# Altium PCB Cell Characterization Board V2.PcbDoc (part 1 of 3)
Units mm, origin at the board's own origin, x right, y up, seen from the top; angles counter-clockwise.
Board outline 180.24 x 170.15 mm, 4 copper layers (SIG1, GND, PWR, SIG2), stack 1.746 mm thick; 137 components, 113 nets, 550 pads, 376 vias.
Unrouted connection lines stored in the file: 58.
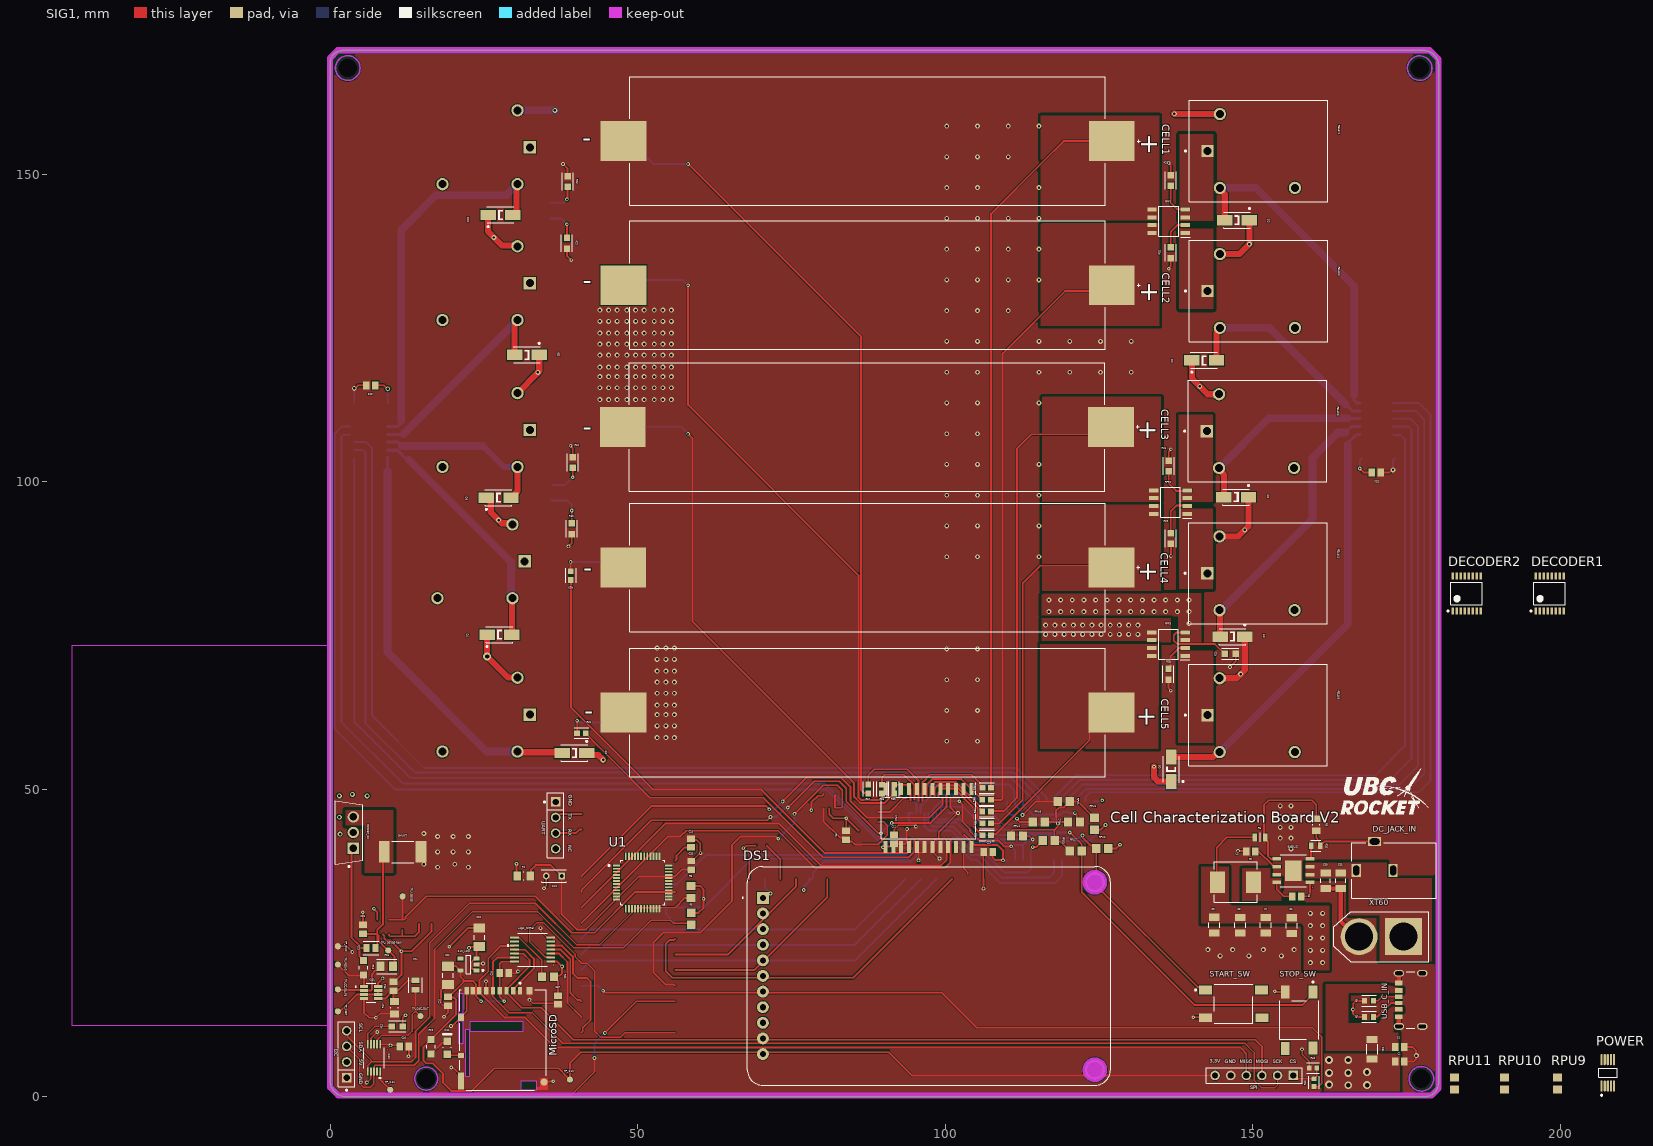
[diagram p0: SIG1 view]
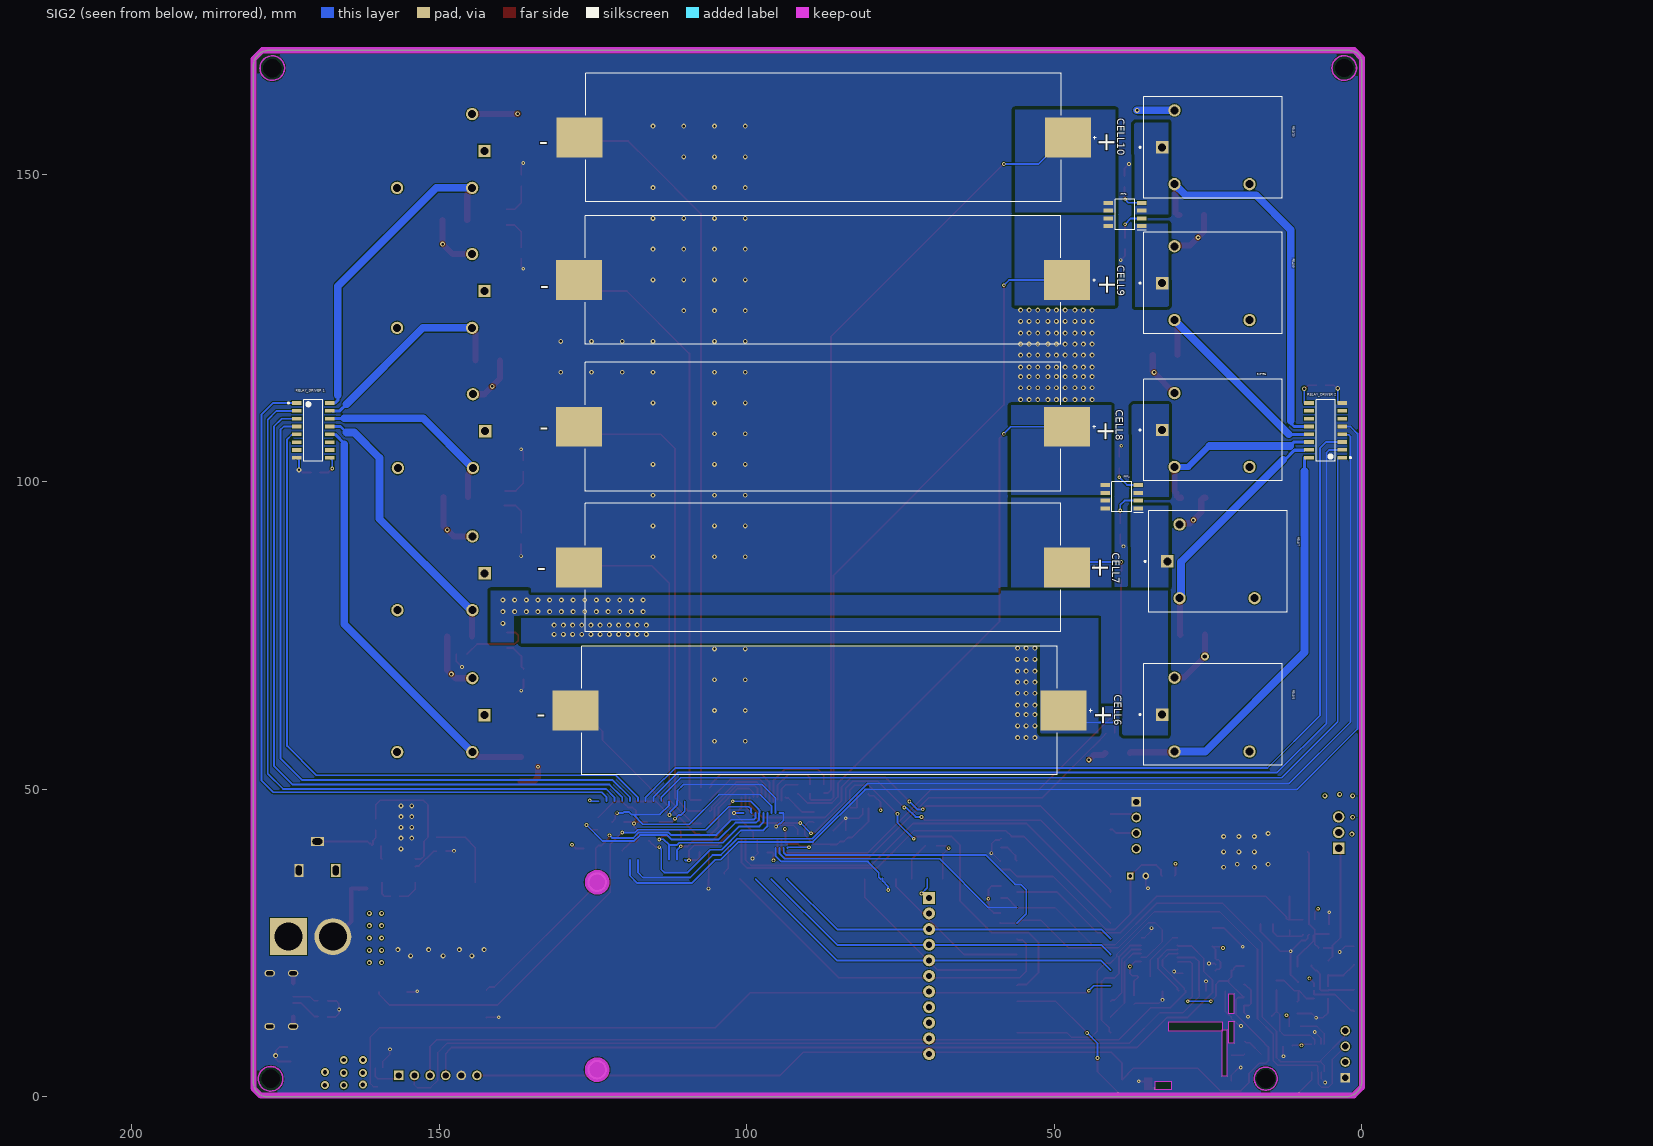
[diagram p1: SIG2 view, seen from below]
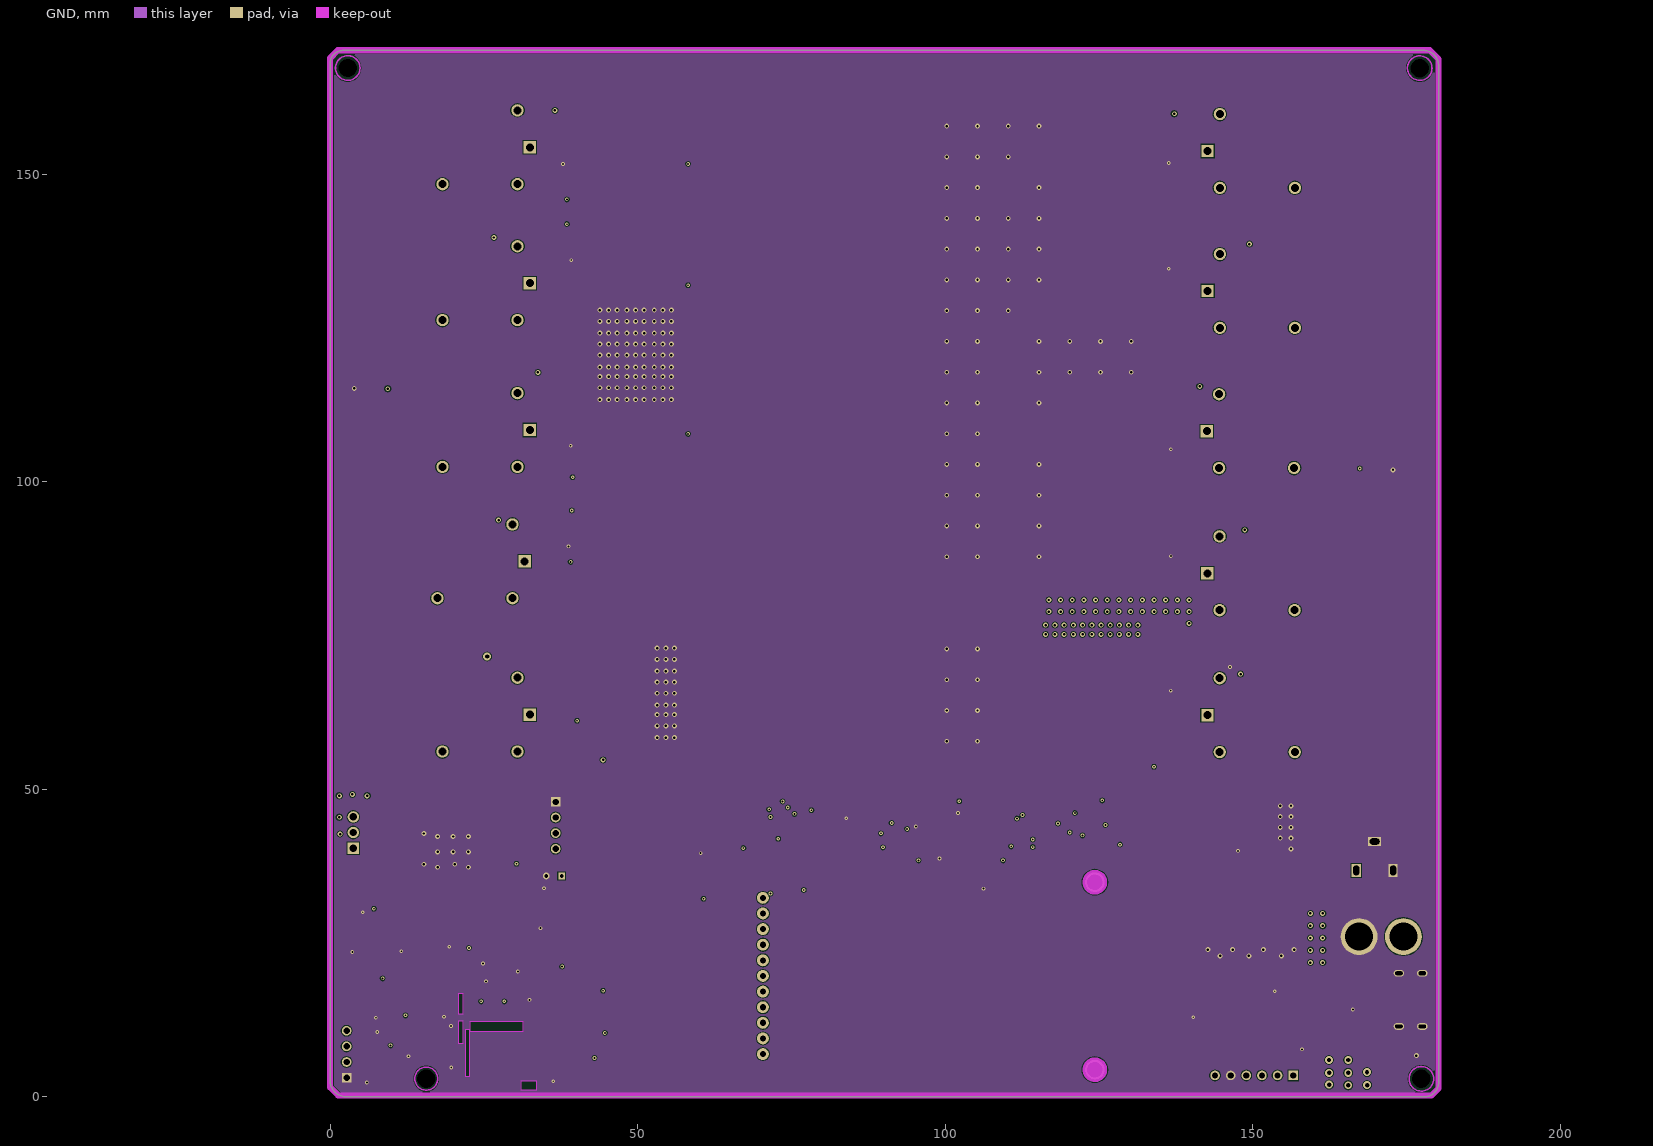
[diagram p2: GND]
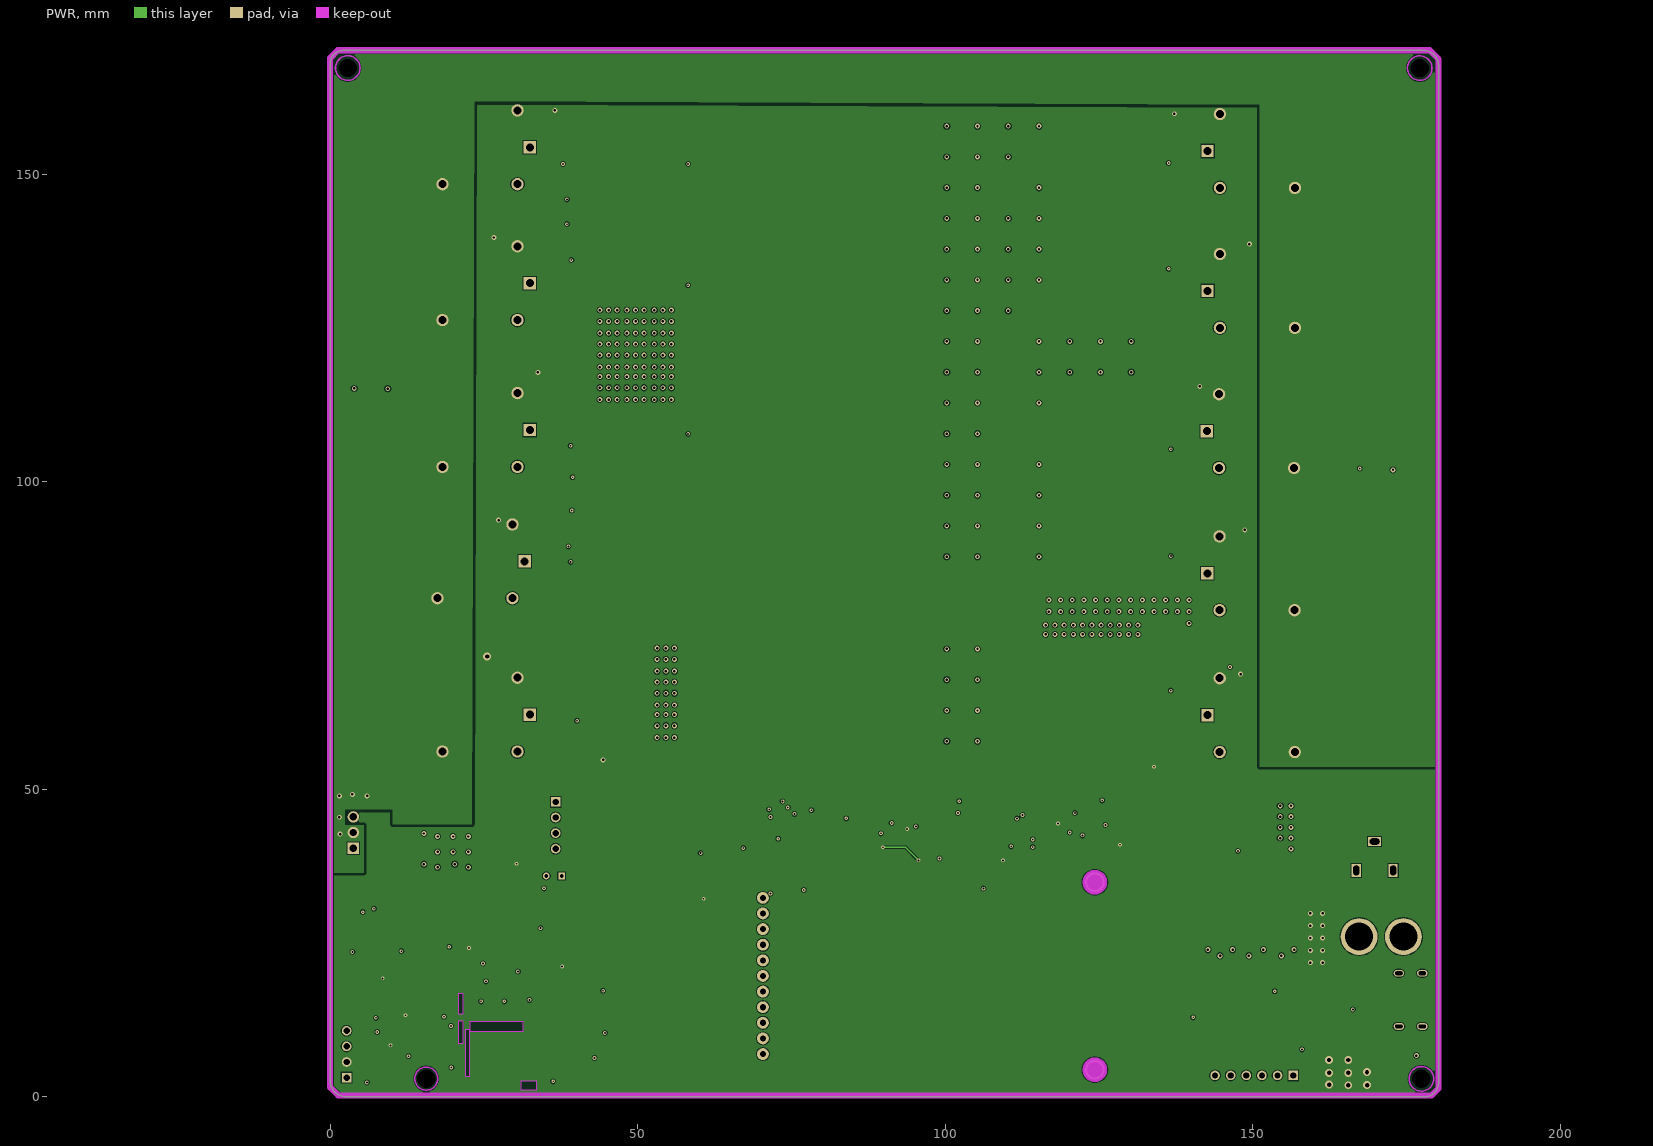
[diagram p3: PWR]
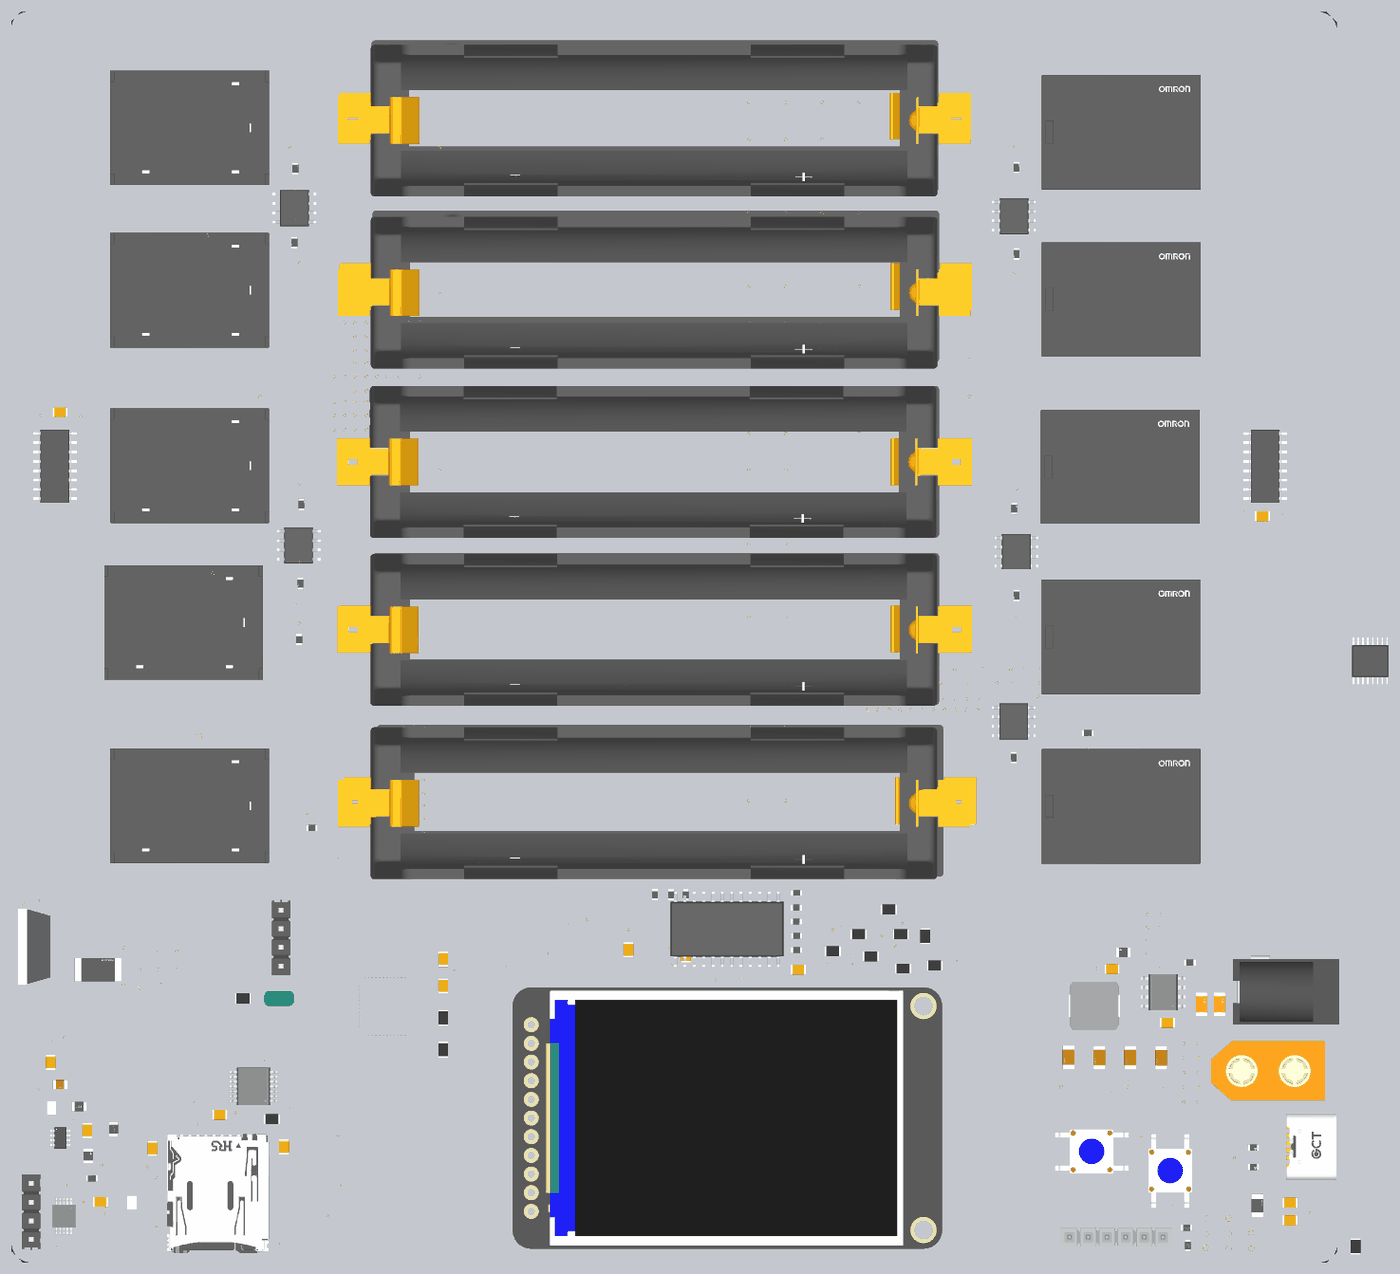
[diagram p5: 3D render of the assembled board from above, using the file's embedded part models]
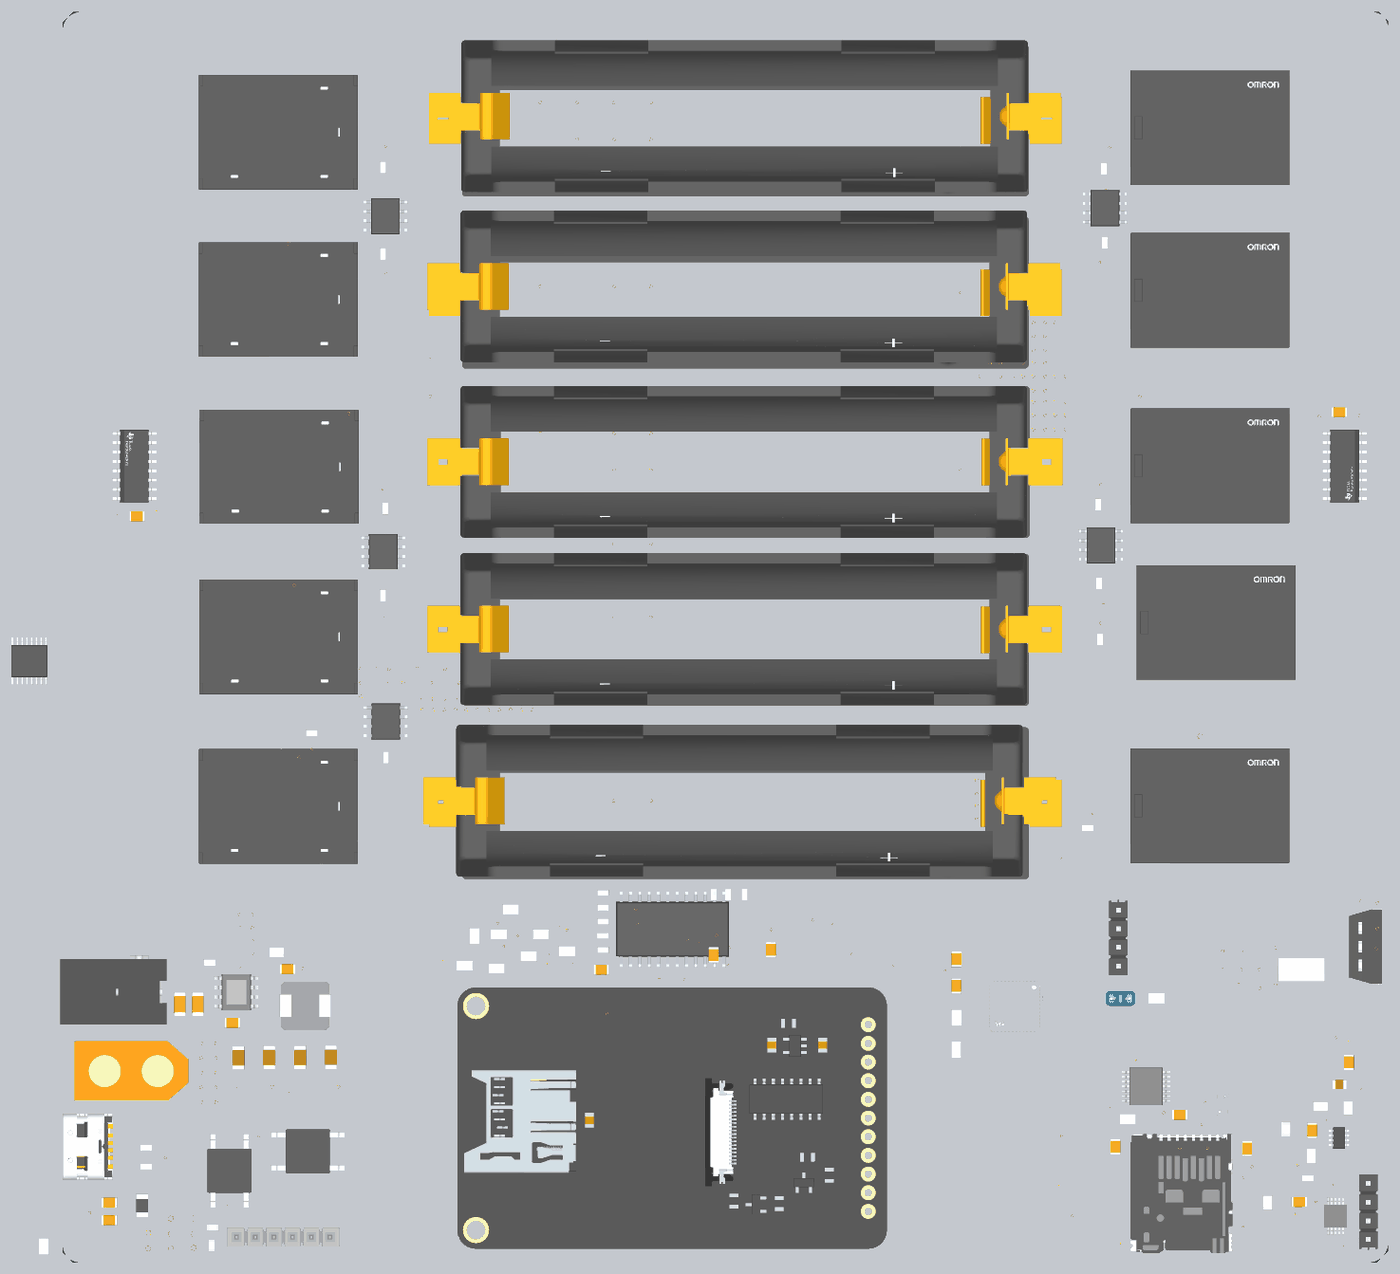
[diagram p6: 3D render of the assembled board from below, using the file's embedded part models]

## Layer stack, top to bottom
Top Solder: solder mask 0.0127, Solder Resist, Dk 3.3
SIG1: signal copper 0.0178
Dielectric 2: prepreg 0.0711, PP-006, Dk 4.1
GND: signal copper 0.035
Dielectric1: core 1.4986, FR-4, Dk 4.3
PWR: signal copper 0.035
Dielectric 3: prepreg 0.0711, PP-006, Dk 4.1
SIG2: signal copper 0.0178
Bottom Solder: solder mask 0.0127, Solder Resist, Dk 3.3

## Board outline
0,2.642 0,168.021 cw(c2.134,168.021) 2.134,170.155 177.749,170.155 cw(c177.749,167.665) 180.238,167.665 180.238,2.337 cw(c177.902,2.337) 177.902,0 2.642,0 cw(c2.642,2.642)

## Design rules (kind name [scope] priority, off if disabled: settings)
BoardOutlineClearance BoardOutlineClearance_1 [(InComponent('XT60') AND InComponent('DC JACK - IN'))] p1: gap=0 ignorepadtopadclearanceinfootprint=FALSE
BoardOutlineClearance [All] p2: gap=0.2 ignorepadtopadclearanceinfootprint=FALSE
Clearance Poly-Clearance [InPolygon vs InPolygon] p1: gap=0.5 ignorepadtopadclearanceinfootprint=TRUE
Clearance MicroSD [InComponent('MicroSD')] p2: gap=0 ignorepadtopadclearanceinfootprint=TRUE
Clearance [WithinRoom('DAC_Clearance')] p3: gap=0.08 ignorepadtopadclearanceinfootprint=TRUE
Clearance Clearance_1 [All] p4: gap=0.14 ignorepadtopadclearanceinfootprint=TRUE
ComponentClearance "Cell Holder" [InComponent('Cell*')] p1: gap=0.254 collisioncheckmode=3 verticalgap=0 showdistances=FALSE checkcomponentboundary=TRUE
ComponentClearance ComponentClearance_1 [All] p2: gap=0.254 collisioncheckmode=3 verticalgap=0.254 showdistances=FALSE
DiffPairsRouting [All] p1: maxlimit=0.254 minlimit=0.254 mostfreqgap=0.254 toplayer_minwidth=0.254 toplayer_maxwidth=0.254 toplayer_prefwidth=0.254 midlayer1_minwidth=0.254 midlayer1_maxwidth=0.254 midlayer1_prefwidth=0.254 midlayer2_minwidth=0.254 midlayer2_maxwidth=0.254 midlayer2_prefwidth=0.254 bottomlayer_minwidth=0.254 bottomlayer_maxwidth=0.254 bottomlayer_prefwidth=0.254 maxuncoupledlength=12.7
HoleSize [All] p1: absolutevalues=TRUE maxlimit=7.62 minlimit=0.25 maxpercent=80.000 minpercent=20.000
MinimumAnnularRing [All] p1: minimumring=0.15
MinimumSolderMaskSliver SLIVER_IC_GANGPADS [InComponent('OA1') or InComponent('OA I_SENSE') or   InComponent('OA UB 2') or InComponent('I2C_EXPANDER')] p1: minsoldermaskwidth=0
MinimumSolderMaskSliver MinimumSolderMaskSliver_1 [All] p2: minsoldermaskwidth=0.08
PasteMaskExpansion [All] p1: expansion=0.254
PlaneClearance [All] p1: clearance=0.381
PlaneConnect [All] p1: planeconnectstyle=Direct reliefexpansion=0.508 reliefentries=4 reliefconductorwidth=0.254 reliefairgap=0.254
PolygonConnect [All] p1: connectstyle=Direct reliefconductorwidth=0.254 reliefentries=4 polygonreliefangle="90 Angle" airgapwidth=0.254
RoutingVias [All] p1: holewidth=0.35 width=0.5 viastyle="Through Hole" minholewidth=0.25 minwidth=0.5 maxholewidth=1 maxwidth=1.5
SMDNeckDown [All] p1: percent=100.000
SilkToSilkClearance [All] p1: silktosilkclearance=0.13
SilkToSolderMaskClearance SilkscreenOverComponentPads [InComponent('FB1')] p1: minsilkscreentomaskgap=0 clearancetoexposedcopper=TRUE
SilkToSolderMaskClearance [IsPad] p2: minsilkscreentomaskgap=0.15 clearancetoexposedcopper=TRUE
SolderMaskExpansion TentVias [IsVia] p1: expansion=0.102 istentingtop=FALSE
SolderMaskExpansion [All] p2: expansion=0.102 istentingtop=FALSE
SupplyNets "Schematic Supply Nets_2" [InNet('3.3V')] p1: voltage=0.000
SupplyNets "Schematic Supply Nets_1" [InNet('5V')] p2: voltage=0.000
SupplyNets "Schematic Supply Nets" [InNet('GND')] p3: voltage=0.000
Width DAC [WithinRoom('DAC_Clearance')] p1: maxlimit=0.254 minlimit=0.2 preferedwidth=0.254 midlayer1_minwidth=0.254 midlayer2_minwidth=0.254 minimp=50.000000 maximp=50.000000 favimp=50.000000
Width [All] p2: maxlimit=2 minlimit=0.25 preferedwidth=1 midlayer1_minwidth=0.254 midlayer1_maxwidth=0.254 midlayer1_prefwidth=0.254 midlayer2_minwidth=0.254 midlayer2_maxwidth=0.254 midlayer2_prefwidth=0.254 bottomlayer_minwidth=0.3 bottomlayer_maxwidth=1.25 minimp=50.000000 maximp=50.000000 favimp=50.000000
21 further rules are at their usual default settings.

## Classes and differential pairs
component class U_MicroSD: C20 C26 C27 D11 Logic_Shifter MicroSD R19 R21 R42 R43 SPI
component class U_MCU: C24 DS1 I2C R5 R8 U1 UART
component class "U_Constant Current Sink": C13 C15 C17 C25 DAC MOSFET_CC NTC OA1 R1 R12 R13 R14 R15 R17 SHUNT
component class "U_Cell Monitoring": C12 C16 MUX "POWER MONITOR IC" R32 R33 R34 R35 R36 R37 R38 R39 R40 R41 RPU9 RPU10 RPU11
component class "U_Cell Holders": CELL1 CELL2 CELL3 CELL4 CELL5 CELL6 CELL7 CELL8 CELL9 CELL10 R22 R23 R24 R25 R26 R27 R28 R29 R30 R31 RPP1 RPP2 RPP3 RPP4 RPP5
component class "U_Buck and LDO": 3.3V_LDO BUCK_IC C1 C2 C3 C5 C6 C7 C8 C9 C10 C11 C21 C22 DC_JACK_IN FB1 L1 R3 R4 R6 R9 R20 USB_C_IN XT60
component class "U_Sequantial Cell Switching": C4 C14 C19 C23 D1 D2 D3 D4 D5 D6 D7 D8 D9 D10 DECODER1 DECODER2 RELAY1 RELAY2 RELAY3 RELAY4 RELAY5 RELAY6 RELAY7 RELAY8 RELAY9 RELAY10 "RELAY_DRIVER 1" "RELAY_DRIVER 2" RPU1 RPU2 RPU3 RPU4 RPU5 RPU6 RPU7 RPU8 START_SW STOP_SW

## Components (designator, comment, footprint, x,y, rotation, side; value= is the part's Value field where it differs from the comment)
3.3V_LDO "MIC5504-3.3YM5-TR" FP-SOT23-5LD-PL-1-MFG 22.487,21.51 r180 top
BUCK_IC "AP64502QSP-13" SO-8EP_DIO 156.618,36.774 r180 top
C1 "100nF" CAPC2013X95X50LL10T25 173.888,8.144 r180 top
C2 "100nF" CAPC2013X95X50LL10T25 173.888,5.74 r180 top
C3 "100nF" CAPC2013X95X50LL10T25 157.182,32.614 r0 top
C4 "100nF" CAPC2013X95X50LL10T25 83.922,42.54 r90 top
C5 "100nF" CAPC2013X95X50LL10T25 149.667,39.929 r0 top
C6 "47uF" FP-GRM31C-0_2-e0_3_0_8-IPC_C 156.354,27.843 r270 top
C7 "47uF" FP-GRM31C-0_2-e0_3_0_8-IPC_C 152.151,27.898 r270 top
C8 "47uF" FP-GRM31C-0_2-e0_3_0_8-IPC_C 147.96,27.898 r270 top
C9 "47uF" FP-GRM31C-0_2-e0_3_0_8-IPC_C 143.769,27.924 r270 top
C10 "10uF" FP-CL31-IPC_C 161.851,35.141 r270 top
C11 "10uF" FP-CL31-IPC_C 164.301,35.141 r270 top
C12 "100nF" CAPC2013X95X50LL10T25 91.712,41.853 r270 top
C13 "10nF" FP-GCM219-0_15-IPC_C 6.642,24.21 r0 top
C14 "100nF" CAPC2013X95X50LL10T25 170.121,101.535 r180 top
C15 "100nF" CAPC2013X95X50LL10T25 12.088,8.217 r0 top
C16 "100nF" CAPC2013X95X50LL10T25 5.348,27.232 r90 top
C17 "100nF" CAPC2013X95X50LL10T25 10.323,17.974 r90 top
C19 "100nF" CAPC2013X95X50LL10T25 6.629,115.697 r0 top
C20 "100nF" CAPC2013X95X50LL10T25 19.164,15.532 r90 top
C21 "1uF" CAPC3216X180X50ML20T25 19.164,19.749 r90 top
C22 "1uF" CAPC3216X180X50ML20T25 24.275,25.932 r270 top
C23 "100nF" CAPC2013X95X50LL10T25 107,39.84 r180 top
C24 "100nF" CAPC2013X95X50LL10T25 58.701,41.273 r270 top
C25 "100nF" CAPC2013X95X50LL10T25 58.721,37.624 r270 top
C26 "100nF" CAPC2013X95X50LL10T25 28.325,20.099 r180 top
C27 "100nF" CAPC2013X95X50LL10T25 37.075,15.745 r90 top
CELL1 "1042P" FP-1042P-MFG 87.399,155.392 r0 top
CELL2 "1042P" FP-1042P-MFG 87.399,131.966 r0 top
CELL3 "1042P" FP-1042P-MFG 87.272,108.928 r0 top
CELL4 "1042P" FP-1042P-MFG 87.349,86.068 r0 top
CELL5 "1042P" FP-1042P-MFG 87.374,62.497 r0 top
CELL6 "1042P" FP-1042P-MFG 88.189,62.814 r180 bottom
CELL7 "1042P" FP-1042P-MFG 87.619,86.066 r180 bottom
CELL8 "1042P" FP-1042P-MFG 87.619,108.951 r180 bottom
CELL9 "1042P" FP-1042P-MFG 87.619,132.806 r180 bottom
CELL10 "1042P" FP-1042P-MFG 87.503,155.956 r180 bottom
D1 "S1M-13-F" DIOD-S1M-13-F-SMA-2_V 147.472,142.545 r0 top
D2 "S1M-13-F" DIOD-S1M-13-F-SMA-2_V 142.113,119.736 r180 top
D3 "S1M-13-F" DIOD-S1M-13-F-SMA-2_V 147.325,97.522 r0 top
D4 "S1M-13-F" DIOD-S1M-13-F-SMA-2_V 146.714,74.836 r0 top
D5 "S1M-13-F" DIOD-S1M-13-F-SMA-2_V 136.754,53.264 r270 top
D6 "S1M-13-F" DIOD-S1M-13-F-SMA-2_V 39.726,55.905 r0 top
D7 "S1M-13-F" DIOD-S1M-13-F-SMA-2_V 27.534,75.133 r180 top
D8 "S1M-13-F" DIOD-S1M-13-F-SMA-2_V 27.404,97.415 r180 top
D9 "S1M-13-F" DIOD-S1M-13-F-SMA-2_V 32.004,120.625 r0 top
D10 "S1M-13-F" DIOD-S1M-13-F-SMA-2_V 27.686,143.383 r180 top
D11 "SD Detect" LTST-C170KSKT_V 19.062,8.002 r90 top
DAC "DAC60501ZDGSR" DGS10_TEX 7.142,6.325 r270 top
DC_JACK_IN "PJ-102BH" CUI-PJ-102BH_V 169.84,36.818 r0 top
DECODER1 "CD74HCT238PWR" PW0016A_L 198.272,81.839 r90 top
DECODER2 "CD74HCT238PWR" PW0016A_L 184.785,81.839 r90 top
DS1 "4311" MODULE_4311 97.361,19.655 r270 top
FB1 "3.5A 120ohm" FP-BLM31-0_2-t1_1-MFG 169.438,7.719 r90 top
I2C "TSW-104-23-T-S" FP-TSW-104-23-T-S-MFG 2.692,6.934 r90 top
L1 "MGAH06036R8M-10" IND_MGAH06036R8M-10 147.244,34.925 r180 top value=6.8µH
Logic_Shifter "TXU0304PWR" TSSOP14_PW_TEX 32.925,23.944 r180 top
MicroSD "DM3AT-SF-PEJM5(40)" FP-DM3AT-SF-PEJM5_40-MFG 28.1,9.25 r0 top
MOSFET_CC "IRLZ44NPBF" FP-PG-TO220-3-MFG 3.073,42.978 r180 top
MUX "CD74HCT4067M" SOIC127P1030X265-24N 97.307,45.331 r270 top
NTC "NXRT15XH103FA1B030" FP-NXR_151B030-MFG 36.4,35.922 r180 top
OA1 "TLV9162IDDFR" SOT65P280X110-8N 6.658,16.945 r0 top
"POWER MONITOR IC" "INA226AQDGSRQ1" FP-DGS0010A-IPC_A 207.747,3.912 r90 top
R1 "10k" RESC2013X50X35ML15T15 31.472,35.922 r180 top
R3 "5.1K" FP-MCT0603-IPC_B 168.91,15.623 r0 top
R4 "5.1K" FP-MCT0603-IPC_B 168.91,13.005 r0 top
R5 "Resistor 4k7 +/-1% 0805 125 mW" RESC2013X70X40ML20T20 58.721,28.939 r90 top value=4.7k
R6 "43k" FP-MCU0805-IPC_C 151.196,42.2 r180 top
R8 "Resistor 4k7 +/-1% 0805 125 mW" RESC2013X70X40ML20T20 58.701,33.312 r90 top value=4.7k
R9 "8.2k" RESC0805(2012)_N 160.35,44.247 r90 top value="8200.00 Ohm"
R12 "10k" FP-AC0603-IPC_A 10.935,11.453 r180 top
R13 "300" FP-CR0805-MFG 5.439,20.994 r270 top
R14 "18k" FP-CRGP0805-IPC_C 13.888,18.154 r270 top value=18KΩ
R15 "1k" FP-RN73R2A-IPC_A 9.204,21.213 r0 top
R17 "2k" FP-MCU0805-IPC_A 10.461,14.487 r90 top
R19 "300" FP-CR0805-MFG 16.4,8.129 r90 top
R20 "200k" FP-CRCW0603-HPe3-MFG 160.248,40.822 r180 top
R21 "Resistor 4k7 +/-1% 0805 125 mW" RESC2013X70X40ML20T20 35.425,19.529 r0 top value=4.7k
R22 "10k" FP-AC0603-IPC_A 38.623,148.832 r90 top
R23 "10k" FP-AC0603-IPC_A 146.367,72.029 r0 top
R24 "10k" FP-AC0603-IPC_A 39.446,103.13 r90 top
R25 "10k" FP-AC0603-IPC_A 136.357,102.586 r90 top
R26 "10k" FP-AC0603-IPC_A 136.677,148.996 r90 top
R27 "10k" FP-AC0603-IPC_A 38.503,138.782 r270 top
R28 "10k" FP-AC0603-IPC_A 136.296,68.708 r270 top
R29 "10k" FP-AC0603-IPC_A 136.677,90.768 r270 top
R30 "10k" FP-AC0603-IPC_A 39.296,92.364 r270 top
R31 "10k" FP-AC0603-IPC_A 136.677,137.236 r270 top
R32 "2k" FP-TFCR0603-IPC_B 106.767,42.518 r180 top
R33 "2k" FP-TFCR0603-IPC_B 106.777,44.454 r180 top
R34 "2k" FP-TFCR0603-IPC_B 106.742,46.4 r180 top
R35 "2k" FP-TFCR0603-IPC_B 106.742,48.287 r180 top
R36 "2k" FP-TFCR0603-IPC_B 106.767,50.251 r180 top
R37 "2k" FP-TFCR0603-IPC_B 87.507,50.054 r90 top
R38 "2k" FP-TFCR0603-IPC_B 89.738,50.038 r90 top
R39 "2k" FP-TFCR0603-IPC_B 91.712,50.038 r90 top
R40 "2k" FP-TFCR0603-IPC_B 39.141,84.76 r270 top
R41 "2k" FP-TFCR0603-IPC_B 40.869,59.131 r0 top
R42 "1.2k" FP-CRGCQ0603-IPC_C 159.986,2.305 r270 top value=1.2KΩ
R43 "2.2k" FP-CRGCQ0603-IPC_C 159.811,4.72 r0 top value=2.2KΩ
RELAY1 "G5LE-1A DC5" FP-G5LE-1A_DC5-MFG 150.923,153.788 r0 top
RELAY2 "G5LE-1A DC5" FP-G5LE-1A_DC5-MFG 150.923,131.03 r0 top
RELAY3 "G5LE-1A DC5" FP-G5LE-1A_DC5-MFG 150.796,108.242 r0 top
RELAY4 "G5LE-1A DC5" FP-G5LE-1A_DC5-MFG 150.873,85.132 r0 top
RELAY5 "G5LE-1A DC5" FP-G5LE-1A_DC5-MFG 150.898,62.061 r0 top
RELAY6 "G5LE-1A DC5" FP-G5LE-1A_DC5-MFG 24.222,62.143 r180 bottom
RELAY7 "G5LE-1A DC5" FP-G5LE-1A_DC5-MFG 23.396,87.071 r180 bottom
RELAY8 "G5LE-1A DC5" FP-G5LE-1A_DC5-MFG 24.222,108.423 r180 bottom
RELAY9 "G5LE-1A DC5" FP-G5LE-1A_DC5-MFG 24.222,132.298 r180 bottom
RELAY10 "G5LE-1A DC5" FP-G5LE-1A_DC5-MFG 24.222,154.392 r180 bottom
"RELAY_DRIVER 1" "ULN2003V12DR" FP-D0016A-MFG 170.494,108.356 r180 bottom
"RELAY_DRIVER 2" "ULN2003V12DR" FP-D0016A-MFG 5.904,108.37 r0 bottom
RPP1 "MCQ7328-TP" SOIC127P600X175-8N 136.347,142.372 r180 top
RPP2 "MCQ7328-TP" SOIC127P600X175-8N 136.652,96.694 r180 top
RPP3 "MCQ7328-TP" SOIC127P600X175-8N 136.302,73.609 r180 top
RPP4 "MCQ7328-TP" SOIC127P600X175-8N 39.046,97.585 r0 bottom
RPP5 "MCQ7328-TP" SOIC127P600X175-8N 38.503,143.467 r0 bottom
RPU1 "Resistor 4k7 +/-1% 0805 125 mW" RESC2013X70X40ML20T20 119.299,48.044 r0 top value=4.7k
RPU2 "Resistor 4k7 +/-1% 0805 125 mW" RESC2013X70X40ML20T20 120.949,44.679 r180 top value=4.7k
RPU3 "Resistor 4k7 +/-1% 0805 125 mW" RESC2013X70X40ML20T20 116.869,41.653 r0 top value=4.7k
RPU4 "Resistor 4k7 +/-1% 0805 125 mW" RESC2013X70X40ML20T20 111.674,42.378 r180 top value=4.7k
RPU5 "Resistor 4k7 +/-1% 0805 125 mW" RESC2013X70X40ML20T20 124.257,44.415 r90 top value=4.7k
RPU6 "Resistor 4k7 +/-1% 0805 125 mW" RESC2013X70X40ML20T20 125.552,40.403 r0 top value=4.7k
RPU7 "Resistor 4k7 +/-1% 0805 125 mW" RESC2013X70X40ML20T20 121.249,40 r180 top value=4.7k
RPU8 "Resistor 4k7 +/-1% 0805 125 mW" RESC2013X70X40ML20T20 115.219,44.679 r180 top value=4.7k
RPU9 "Resistor 4k7 +/-1% 0805 125 mW" RESC2013X70X40ML20T20 199.568,2.184 r90 top value=4.7k
RPU10 "Resistor 4k7 +/-1% 0805 125 mW" RESC2013X70X40ML20T20 190.932,2.184 r90 top value=4.7k
RPU11 "Resistor 4k7 +/-1% 0805 125 mW" RESC2013X70X40ML20T20 182.804,2.184 r90 top value=4.7k
SHUNT "0.05" FP-CRA2512-IPC_A 11.794,39.827 r0 top
SPI "TSW-106-07-G-S" SMTC-TSW-106-07-X-S 156.591,3.48 r180 top
START_SW "2-1977223-2" FP-2-1977223-2-MFG 146.893,15.123 r90 top
STOP_SW "2-1977223-2" FP-2-1977223-2-MFG 157.561,12.505 r0 top
U1 "STM32G431CBT6" FP-LQFP48-5B-MFG 50.825,34.84 r0 top
UART "TSW-104-23-T-S" FP-TSW-104-23-T-S-MFG 36.681,44.145 r270 top
USB_C_IN "USB4125-GF-A-0190" FP-USB4125-GF-A-0190-MFG 176.781,15.773 r270 top
XT60 "XT60-M" AMASS_XT60-M 170.91,26.045 r180 top

## Footprints (in the part's own frame and the unit in brackets; to place one, negate y for a bottom-side part, rotate by r counter-clockwise, add the part's x,y. Pads: shape width x height; smd on the part's side, far side on the other; paste and mask are expansions set on the pad)
AMASS_XT60-M [mm]
  round 6 hole 4.55: N(3.6,0)
  rect 6x6 / inner round 6 / far side rect 6x6 hole 4.55: P(-3.6,0)
  silkscreen extent -7.75,-4.05 7.75,4.05, body extent -7.75,-4.05 7.75,4.05, height 16
CAPC2013X95X50LL10T25 [mm] "Chip Capacitor, 2-Leads, Body 2.10x1.35mm, IPC High Density"
  rect 1.05x1.3 smd: 1(-0.725,0) 2(0.725,0)
  body extent -1.05,-0.67 1.05,0.67, height 0.95
CAPC3216X180X50ML20T25 [mm] "Chip Capacitor, 2-Leads, Body 3.40x1.80mm, IPC Low Density"
  rect 1.5x1.9 smd: 1(-1.5,0) 2(1.5,0)
  silkscreen extent -0.35,-0.85 0.35,0.85, body extent -1.7,-0.9 1.7,0.9, height 1.8
CUI-PJ-102BH_V [mm] "THD, 3-Leads, Body 14.4x9mm, Height 11mm"
  rect 1.5x2.1 hole 1 slot 1.6 at 90 deg: 1(-3,0) 2(3,0)
  rect 2.1x1.5 hole 1 slot 1.6 at 0 deg: 3(0,4.7)
  silkscreen extent -3.7,-4.5 10.02,4.5, body extent -3.7,-4.5 10.7,4.9, height 11
DGS10_TEX [mil]
  rect 52.5x11 smd paste+0 mask+0: 1(-87.25,39.37) 2(-87.25,19.69) 3(-87.25,0) 4(-87.25,-19.68) 5(-87.25,-39.37) 6(87.25,-39.37) 7(87.25,-19.68) 8(87.25,0) 9(87.25,19.69) 10(87.25,39.37)
  silkscreen extent -66,-66 134,66, body extent -99,-61 99,61, height 43
DIOD-S1M-13-F-SMA-2_V [mm] "SMD, 2-Leads, Body 4.3x2.605mm, Height 2.3mm"
  rect 2.5x1.7 smd: 1(-2,0) 2(2,0)
  silkscreen extent -2.15,-1.3 2.15,2.03, body extent -2.15,-1.3 2.15,1.3, height 2.3
FP-2-1977223-2-MFG [mm]
  rect 1.4x2.1 smd paste+0 mask+0: 1(2.25,4.55) 2(2.25,-4.55) 3(-2.25,4.55) 4(-2.25,-4.65)
  silkscreen extent -3.15,-3.15 3.15,6.27, body extent -3.25,-5.8 3.25,5.7, height 0.25
FP-1042P-MFG [mil]
  rect 294x255 smd paste+0 mask+0: 1(-1562.5,0) 2(1562.5,0)
  silkscreen extent -1522,-412 1745,412, body extent -1693,-407 1693,406, height 595
FP-AC0603-IPC_A [mm]
  rect 1.059x1.012 smd paste+0 mask+0: 1(-0.877,0) 2(0.877,0)
  silkscreen extent -1.41,-0.91 1.41,0.91, body extent -0.8,-0.4 0.8,0.4, height 0.55
FP-BLM31-0_2-t1_1-MFG [mm]
  rect 1.15x1.8 smd paste+0 mask+0: 1(-1.575,0) 2(1.575,0)
  silkscreen extent -0.82,-0.9 0.82,0.9, body extent -2.25,-1 2.25,1, height 0.25
FP-CL31-IPC_C [mm]
  rect 1.154x1.706 smd paste+0 mask+0: 1(-1.276,0) 2(1.276,0)
  silkscreen extent -0.32,-0.8 0.32,0.8, body extent -1.6,-0.8 1.6,0.8, height 1.8
FP-CR0805-MFG [mm]
  rect 1.15x1.15 smd paste+0 mask+0: 1(-1.175,0) 2(1.175,0)
  silkscreen extent -0.23,-0.67 0.23,0.67, body extent -1.85,-0.77 1.85,0.77, height 0.25
FP-CRA2512-IPC_A [mm]
  rect 1.756x3.506 smd paste+0 mask+0: 1(-2.975,0) 2(2.975,0)
  silkscreen extent -1.8,-1.75 1.8,1.75, body extent -3.2,-1.6 3.2,1.6, height 0.9
FP-CRCW0603-HPe3-MFG [mm]
  rect 0.75x1 smd paste+0 mask+0: 1(-0.75,0) 2(0.75,0)
  silkscreen extent -0.8,-0.9 0.8,0.9, body extent -0.8,-0.43 0.8,0.43, height 0.55
FP-CRGCQ0603-IPC_C [mm]
  rect 0.758x0.812 smd paste+0 mask+0: 1(-0.627,0) 2(0.627,0)
  silkscreen extent -1.01,-0.85 1.01,0.85, body extent -1.11,-0.55 1.11,0.55, height 0.25
FP-CRGP0805-IPC_C [mm]
  rect 0.906x1.31 smd paste+0 mask+0: 1(-0.776,0) 2(0.776,0)
  silkscreen extent -1.23,-1.1 1.23,1.1, body extent -1.33,-0.8 1.33,0.8, height 0.25
FP-D0016A-MFG [mm]
  rect 1.55x0.6 smd paste-1000 mask+0: 1(-2.7,4.445) 2(-2.7,3.175) 3(-2.7,1.905) 4(-2.7,0.635) 5(-2.7,-0.635) 6(-2.7,-1.905) 7(-2.7,-3.175) 8(-2.7,-4.445) 9(2.7,-4.445) 10(2.7,-3.175) 11(2.7,-1.905) 12(2.7,-0.635) 13(2.7,0.635) 14(2.7,1.905) 15(2.7,3.175) 16(2.7,4.445)
  silkscreen extent -4.18,-5 1.55,5, body extent -3,-4.95 3,4.95, height 1.75
FP-DGS0010A-IPC_A [mm]
  rect 1.857x0.35 smd paste+0 mask+0: 1(-2.151,1)
  rrect100% 1.857x0.35 smd paste+0 mask+0: 2(-2.151,0.5) 3(-2.151,0) 4(-2.151,-0.5) 5(-2.151,-1) 6(2.151,-1) 7(2.151,-0.5) 8(2.151,0) 9(2.151,0.5) 10(2.151,1)
  silkscreen extent -3.78,-1.5 0.72,1.5
FP-DM3AT-SF-PEJM5_40-MFG [mm]
  rect 0.7x1.2 smd paste+0 mask+0: 1(2.775,7.975) 2(1.675,7.975) 3(0.575,7.975) 4(-0.525,7.975) 5(-1.625,7.975) 6(-2.725,7.975) 7(-3.825,7.975) 8(-4.925,7.975) 9(-5.875,7.975)
  rect 1x0.8 smd paste+0 mask+0: 10(-6.825,-2.525)
  rect 1x1.2 smd paste+0 mask+0: 11(4.325,7.975) 12(-6.825,3.675)
  rect 1x2.8 smd paste+0 mask+0: 13(-6.825,-6.675)
  round 1.145 smd paste+0 mask+0: 14(6.689,-6.861)
  SIG1 region: 6.025,-6.175 7.325,-6.175 7.325,-8.075 5.475,-8.075 5.475,-7.725 5.875,-7.725 6.025,-7.575 6.025,-6.175
  Keep-Out Layer region: -7.225,4.275 -6.475,4.275 -6.475,7.525 -7.225,7.525
  Keep-Out Layer region: -7.225,-0.525 -6.475,-0.525 -6.475,3.075 -7.225,3.075
  Keep-Out Layer region: -6.125,-5.925 -5.425,-5.925 -5.425,1.675 -6.125,1.675
  Keep-Out Layer region: -5.425,1.375 3.275,1.375 3.275,2.975 -5.425,2.975
  Keep-Out Layer region: 2.925,-8.075 5.475,-8.075 5.475,-6.725 2.925,-6.725
  silkscreen extent -7.02,-8.18 7.02,9.35, body extent -7.42,-8.27 7.42,8.67, height 0.25
FP-G5LE-1A_DC5-MFG [mm]
  rect 2x2 hole 1.3 paste-2539.97 mask+0: 1(-8.25,0)
  round 2 hole 1.3 paste-2539.97 mask+0: 2(-6.25,-6) 3(5.95,-6) 5(-6.25,6)
  silkscreen extent -11.97,-8.25 11.25,8.25, body extent -10.8,-7.8 10.8,7.8, height 19
FP-GCM219-0_15-IPC_C [mm]
  rect 1.006x1.308 smd paste+0 mask+0: 1(-0.726,0) 2(0.726,0)
  silkscreen extent -1.23,-1.1 1.23,1.1, body extent -1.33,-0.8 1.33,0.8, height 0.25
FP-GRM31C-0_2-e0_3_0_8-IPC_C [mm]
  rect 1.155x1.706 smd paste+0 mask+0: 1(-1.276,0) 2(1.276,0)
  silkscreen extent -0.4,-0.9 0.4,0.9, body extent -1.95,-1 1.95,1, height 0.25
FP-LQFP48-5B-MFG [mm]
  rect 1.2x0.3 smd paste+0 mask+0: 1(-4.25,2.75) 2(-4.25,2.25) 3(-4.25,1.75) 4(-4.25,1.25) 5(-4.25,0.75) 6(-4.25,0.25) 7(-4.25,-0.25) 8(-4.25,-0.75) 9(-4.25,-1.25) 10(-4.25,-1.75) 11(-4.25,-2.25) 12(-4.25,-2.75) 25(4.25,-2.75) 26(4.25,-2.25) 27(4.25,-1.75) 28(4.25,-1.25) 29(4.25,-0.75) 30(4.25,-0.25) 31(4.25,0.25) 32(4.25,0.75) 33(4.25,1.25) 34(4.25,1.75) 35(4.25,2.25) 36(4.25,2.75)
  rect 0.3x1.2 smd paste+0 mask+0: 13(-2.75,-4.25) 14(-2.25,-4.25) 15(-1.75,-4.25) 16(-1.25,-4.25) 17(-0.75,-4.25) 18(-0.25,-4.25) 19(0.25,-4.25) 20(0.75,-4.25) 21(1.25,-4.25) 22(1.75,-4.25) 23(2.25,-4.25) 24(2.75,-4.25) 37(2.75,4.25) 38(2.25,4.25) 39(1.75,4.25) 40(1.25,4.25) 41(0.75,4.25) 42(0.25,4.25) 43(-0.25,4.25) 44(-0.75,4.25) 45(-1.25,4.25) 46(-1.75,4.25) 47(-2.25,4.25) 48(-2.75,4.25)
  silkscreen extent -5.62,-3.6 3.6,3.6, body extent -4.95,-4.95 4.95,4.95, height 0.25
FP-MCT0603-IPC_B [mm]
  rect 0.864x0.962 smd paste+0 mask+0: 1(-0.729,0) 2(0.729,0)
  silkscreen extent -1.16,-0.88 1.16,0.88, body extent -1.41,-0.73 1.41,0.73, height 0.25
FP-MCU0805-IPC_A [mm]
  rect 1.159x1.508 smd paste+0 mask+0: 1(-1.027,0) 2(1.027,0)
  silkscreen extent -0.07,-0.63 0.07,0.63, body extent -2.11,-1.25 2.11,1.25, height 0.25
FP-MCU0805-IPC_C [mm]
  rect 0.759x1.308 smd paste+0 mask+0: 1(-0.827,0) 2(0.827,0)
  silkscreen extent 0,-0.7 0,0.7, body extent -1.31,-0.8 1.31,0.8, height 0.25
FP-NXR_151B030-MFG [mm]
  rect 1.1x1.1 hole 0.6 paste-2539.97 mask+0: 1(-1.25,0)
  round 1.1 hole 0.6 paste-2539.97 mask+0: 2(1.25,0)
  silkscreen extent -2,-1 2,1, body extent -2.1,-1.1 2.1,1.1, height 0.25
FP-PG-TO220-3-MFG [mm]
  rect 1.85x1.85 hole 1.2 paste-2539.97 mask+0: 1(-0.705,2.54)
  round 1.85 hole 1.2 paste-2539.97 mask+0: 2(-0.705,0) 3(-0.705,-2.54)
  silkscreen extent -2.27,-5.2 2.27,5.62, body extent -2.37,-5.55 2.37,5.55, height 0.25
FP-RN73R2A-IPC_A [mm]
  rect 1.255x1.556 smd paste+0 mask+0: 1(-1.025,0) 2(1.025,0)
  silkscreen extent -1.65,-1.18 1.65,1.18, body extent -2.15,-1.28 2.15,1.28, height 0.25
FP-SOT23-5LD-PL-1-MFG [mm]
  rect 1x0.66 smd paste+0 mask+0: 1(-1.3,0.95) 2(-1.3,0) 3(-1.3,-0.95) 4(1.3,-0.95) 5(1.3,0.95)
  silkscreen extent -2.48,-1.5 0.35,1.5, body extent -1.9,-1.6 1.9,1.6, height 0.25
FP-TFCR0603-IPC_B [mm]
  rect 0.958x0.912 smd paste+0 mask+0: 1(-0.702,0) 2(0.702,0)
  silkscreen extent -1.18,-0.86 1.18,0.86, body extent -1.43,-0.71 1.43,0.71, height 0.25
FP-TSW-104-23-T-S-MFG [mm]
  rect 1.57x1.57 hole 1.02 paste-2539.97 mask+0: 1(-3.81,0)
  round 1.57 hole 1.02 paste-2539.97 mask+0: 2(-1.27,0) 3(1.27,0) 4(3.81,0)
  silkscreen extent -5.98,-1.34 5.27,1.34, body extent -5.37,-1.44 5.37,1.44, height 0.25
FP-USB4125-GF-A-0190-MFG [mm]
  rrect100% 1.1x1.7 hole 1.2 slot 0.6 at 0 deg paste-2539.97 mask+0: 1(-4.32,-3) 2(4.32,-3) 3(-4.32,0.8) 4(4.32,0.8)
  rect 0.7x1.2 smd paste+0 mask+0: A5(-0.5,-3) B5(0.5,-3)
  rect 0.76x1.2 smd paste+0 mask+0: A9(1.52,-3) B9(-1.52,-3)
  rect 0.8x1.2 smd paste+0 mask+0: A12(2.75,-3) B12(-2.75,-3)
  silkscreen extent -4.59,-1.78 4.59,-0.43, body extent -4.47,-3.4 4.47,3.4, height 3.51
IND_MGAH06036R8M-10 [mm]
  rect 2.45x3.5 smd: 1(-2.925,0) 2(2.925,0)
  silkscreen extent -3.5,-3.3 3.5,3.3, body extent -3.5,-3.3 3.5,3.3, height 3.1
LTST-C170KSKT_V [mm] "SMD, 2-Leads, Body 2x1.25mm"
  rect 1.2x1.2 smd: 1(-1.05,0) 2(1.05,0)
  silkscreen extent -0.05,-0.63 2.16,0.64, body extent -1,-0.63 1,0.63, height 1.2
MODULE_4311 [mil]
  rect 76x76 / inner round 76 / far side rect 76x76 hole 39.37: 1(-500,-1062.5)
  round 76 hole 39.37: 2(-400,-1062.5) 3(-300,-1062.5) 4(-200,-1062.5) 5(-100,-1062.5) 6(0,-1062.5) 7(100,-1062.5) 8(200,-1062.5) 9(300,-1062.5) 10(400,-1062.5) 11(500,-1062.5)
  round 125.98 hole 98.43: SH1(-600,1062.5) SH2(600,1062.5)
  Keep-Out Layer circle w78.74: c-600,1062.5 r39.37
  Keep-Out Layer circle w78.74: c600,1062.5 r39.37
  Keep-Out Layer circle w78.74: c-600,1062.5 r39.37
  Keep-Out Layer circle w78.74: c600,1062.5 r39.37
  silkscreen extent -700,-1195 700,1162, body extent -700,-1150 700,1150, height 100
PW0016A_L [mm] "SOP, 16-Leads, Body 5.1x4.5mm, Pitch 0.65mm, IPC High Density"
  rrect25% 1.2x0.4 smd: 1(-2.85,2.275) 2(-2.85,1.625) 3(-2.85,0.975) 4(-2.85,0.325) 5(-2.85,-0.325) 6(-2.85,-0.975) 7(-2.85,-1.625) 8(-2.85,-2.275) 9(2.85,-2.275) 10(2.85,-1.625) 11(2.85,-0.975) 12(2.85,-0.325) 13(2.85,0.325) 14(2.85,0.975) 15(2.85,1.625) 16(2.85,2.275)
  silkscreen extent -2.97,-2.55 1.85,3.15, body extent -3.21,-2.5 3.21,2.5, height 1
RESC0805(2012)_N [mm] "Chip Resistor, Body 2.0x1.3mm, IPC Medium Density"
  rect 1.05x1.4 smd: 1(-0.95,0) 2(0.95,0)
  silkscreen extent -0.05,-0.6 0.05,0.6, body extent -1.1,-0.67 1.1,0.68, height 0.7
RESC2013X50X35ML15T15 [mm] "Chip Resistor, 2-Leads, Body 2.2x1.4mm, IPC Low Density"
  rect 1.2x1.5 smd: 1(-1.05,0) 2(1.05,0)
  silkscreen extent -0.05,-0.65 0.05,0.65, body extent -1.1,-0.7 1.1,0.7, height 0.5
RESC2013X70X40ML20T20 [mm] "Chip Resistor, 2-Leads, Body 2.2x1.35mm, IPC Low Density"
  rect 1.35x1.45 smd: 1(-0.975,0) 2(0.975,0)
  body extent -1.1,-0.67 1.1,0.67, height 0.7
SMTC-TSW-106-07-X-S [mm] ".025 SQ Post Terminal Strip Assembly, 1x6 Pins, Vertical, 2.54mm Pitch, Male"
  rect 1.55x1.55 hole 1.02: 1(0,0)
  round 1.55 hole 1.02: 2(2.54,0) 3(5.08,0) 4(7.62,0) 5(10.16,0) 6(12.7,0)
  silkscreen extent -1.46,-1.27 14.16,1.27, body extent -1.27,-1.24 13.97,1.3, height 8.38
SO-8EP_DIO [mil]
  rect 56x22 smd paste+0 mask+0: 1(-106,75) 2(-106,25) 3(-106,-25) 4(-106,-75) 5(106,-75) 6(106,-25) 7(106,25) 8(106,75)
  rect 107x132 smd paste-65.5 mask+0: 9(0,0)
  silkscreen extent -83,-103 83,103, body extent -120,-97 120,97, height 64
SOIC127P600X175-8N [mm]
  rect 1.525x0.65 smd: 1(-2.712,1.905) 2(-2.712,0.635) 3(-2.712,-0.635) 4(-2.712,-1.905) 5(2.712,-1.905) 6(2.712,-0.635) 7(2.712,0.635) 8(2.712,1.905)
  silkscreen extent -3.47,-2.45 1.6,2.58, body extent -3,-2.45 3,2.45, height 1.75
SOIC127P1030X265-24N [mm]
  rect 1.95x0.65 smd: 1(-4.725,6.985) 2(-4.725,5.715) 3(-4.725,4.445) 4(-4.725,3.175) 5(-4.725,1.905) 6(-4.725,0.635) 7(-4.725,-0.635) 8(-4.725,-1.905) 9(-4.725,-3.175) 10(-4.725,-4.445) 11(-4.725,-5.715) 12(-4.725,-6.985) 13(4.725,-6.985) 14(4.725,-5.715) 15(4.725,-4.445) 16(4.725,-3.175) 17(4.725,-1.905) 18(4.725,-0.635) 19(4.725,0.635) 20(4.725,1.905) 21(4.725,3.175) 22(4.725,4.445) 23(4.725,5.715) 24(4.725,6.985)
  silkscreen extent -5.7,-7.7 3.4,7.7, body extent -5.15,-7.7 5.15,7.7, height 2.65
SOT65P280X110-8N [mm]
  rrect15% 1.37x0.49 smd mask+0: 1(-1.15,0.975) 2(-1.15,0.325) 3(-1.15,-0.325) 4(-1.15,-0.975) 5(1.15,-0.975) 6(1.15,-0.325) 7(1.15,0.325) 8(1.15,0.975)
  silkscreen extent -2.6,-1.54 0.8,1.54, body extent -1.4,-1.45 1.4,1.45, height 1.1
TSSOP14_PW_TEX [mm]
  rect 1.404x0.355 smd paste+0 mask+0: 1(-2.95,1.95) 2(-2.95,1.3) 3(-2.95,0.65) 4(-2.95,0) 5(-2.95,-0.65) 6(-2.95,-1.3) 7(-2.95,-1.95) 8(2.95,-1.95) 9(2.95,-1.3) 10(2.95,-0.65) 11(2.95,0) 12(2.95,0.65) 13(2.95,1.3) 14(2.95,1.95)
  silkscreen extent -2.37,-2.68 4.16,2.68, body extent -3.3,-2.55 3.3,2.55, height 1.2

## Part data
3.3V_LDO: library part CMP-2000-07604-2, "IC REG LINEAR 3.3V 300MA SOT23-5", Case/Package=SOT-23-5, Dropout Voltage=380mV, Max Input Voltage=5.5V, Max Operating Temperature=125°C, Max Output Current=300mA, Min Input Voltage=2.5V, Min Operating Temperature=-40°C, Nominal Output Voltage=3.3V, Operating Supply Current=42uA, Power Supply Rejection Ratio (PSRR)=60dB, Quiescent Current=38uA, Accuracy=3%, Height=1.1mm, Length=2.9mm, Mount="Surface Mount", Number Of Outputs=1, Number of Pins=5, Output Current=300mA, Output Type=Fixed, Output Voltage=3.3V, Packaging="Tape and Reel", REACH SVHC="No SVHC", Width=1.6mm
BUCK_IC: "Description", MANUFACTURER_NAME="Diodes Inc", Copyright="Copyright (C) 2025 Ultra Librarian. All rights reserved.", MANUFACTURER_PART_NUMBER=AP64502QSP-13, RefDes=RefDes, Supplier 1=Avnet, Supplier Part Number 1=AP64502QSP-13, Type=Type
C1 C2 C3 C4 C5 C12 C14 C15 C16 C17 C19 C20 C23 C24 C25 C26 C27: library part CMP-001-00018-6, "Capacitor 100 nF +/-10% 50 V 0805", Capacitor Type=Ceramic, Case/Package=0805, Max Operating Temperature=125°C, Min Operating Temperature=-55°C, Tolerance=10%, Voltage Rating=50V, Mounting Technology=SM, Pins=2, RoHS Compliant=True
C6 C7 C8 C9: library part CMP-2000-05255-3, "Chip Multilayer Ceramic Capacitors for General Purpose, 1206, 47uF, X5R, 15%, 20%, 10V", Case Code (Imperial)=1206, Case Code (Metric)=3216, Dielectric=X5R, Max Operating Temperature=85°C, Min Operating Temperature=-55°C, Package Quantity=2000, Tolerance=20%, Voltage=10V, Capacitance=47uF, Case/Package=1206, Depth=1.6mm, Height=1.6mm, Lead Free="Lead Free", Length=3.2mm, Mount="Surface Mount", Number of Pins=2, Packaging="Tape and Reel", Radiation Hardening=No, REACH SVHC="No SVHC", Termination=SMD/SMT, Thickness=0.071inch, Voltage Rating=10V, Voltage Rating (DC)=10V, Width=1.6mm
C10 C11: library part CMP-13271-000016-1, "CAP CER 10UF 50V X5R 1206", Manufacturer=Samsung, Manufacturer Part Number=CL31A106KBHNNNE, Package=CL31, Temperature="-55°C to +85°C", Temperature Characteristic=X5R, Temperature Coefficient=15%, Temperature Range High=+85°C, Temperature Range Low=-55°C, Tolerance=10%, Voltage=50V, Automotive=No, Capacitance=10uF, Category=Cap, ComponentLink2Description=Datasheet, ComponentLink2URL=http://www.samsungsem.com/kr/support/product-search/mlcc/__icsFiles/afieldfile/2018/06/21/CL31A106KBHNNNE.pdf, Device Class L1="Passive Components", Device Class L2=Capacitors, Device Class L3="Ceramic Capacitors", Digikey Description="CAP CER 10UF 50V X5R 1206", Height=1.8mm, Ipc Land Pattern Name=CAPC320160X160, Lead Free=Yes, Material=Ceramic, Octopart=https://octopart.com/cl31a106kbhnnne-samsung-19832778, RoHS=TRUE, Voltage Rating=50V
C13: library part CMP-06035-023057-1, "Ceramic Capacitor for Automotive 10nF  ±10% 100VDC X8R 0805 Paper T/R"
C21 C22: library part CMP-2000-04991-1, "Chip Capacitor, 1 uF, +/- 10%, 25 V, -55 to 125 degC, 1206 (3216 Metric), RoHS, Tape and Reel", Capacitance - nF=1000nF, Case Code - in=1206, Case Code - mm=3216, Case Height=1.6mm, Case Length=3.2mm, Dielectric=X7R, Manufacturer=Kemet, Maximum Operating Temperature=+125C, Minimum Operating Temperature=-55C, Operating Temperature Range=-55Cto+125C, Package / Case=1206(3216metric), Package Description="2-Pin Surface Mount Device, Body 3.2 x 1.6 mm", Temperature Coefficient / Code=+/-15%, Tolerance=10%, Voltage Rating=25V, Brand=Kemet, Capacitance=1uF, Case Width=1.6mm, Class=Class1, Datasheet URL=https://ciiva.com/datasheet-click-18194173?src=ciiva&sig=6daff8c4, Datasheet Version=Jul-14, Dimensions=1.6mmWx3.2mmLx1.6mmH, Factory Pack Quantity=2000, Manufacturer URL=http://www.kemet.com/, Package Reference=1206, Packaging=Reel, Product=GeneralTypeMLCCs, Product Category=MultilayerCeramicCapacitorsMLCC-SMD/SMT, RoHS=Details, Series=C1206C, Termination Style=SMD/SMT, Type=SMDMLCCX7R6.3-250VDCCommericalGrade, Voltage Rating Dc=25V
CELL1 CELL2 CELL3 CELL4 CELL5 CELL6 CELL7 CELL8 CELL9 CELL10: library part CMP-19636-000019-1, "BATTERY HOLDER 18650 SMD TAB", Max Operating Temperature=145°C, Min Operating Temperature=-50°C, Package Quantity=200, Lead Free="Lead Free", Mount="Surface Mount", Number of Cells=1, Packaging=Tray, Termination=SMD/SMT
D1 D2 D3 D4 D5 D6 D7 D8 D9 D10: library part CMP-0639-00001-1, "Surface Mount Glass Passivated Rectifier, 1000V, 1 A, -65 to 125 degC, 2-Pin SMA Package, RoHS, Tape and Reel", Forward Voltage Drop VF (V)=1.1, Manufacturer="Diodes Inc", Maximum Average Rectified Current IO (A)=1, Maximum Peak Forward Surge Current IFSM (A)=30, Maximum Reverse Current IR (uA)=5, Operating Temperature Range="-65 to 150 degC", Peak Repetitive Reverse Voltage VRRM (V)=1000, Total Capacitance CT (pF)=10, ComponentLink1Description="Manufacturer URL", ComponentLink1URL=http://www.diodes.com/, ComponentLink2Description=Datasheet, ComponentLink2URL=http://diodes.com/datasheets/ds16003.pdf, ComponentLink3Description="Package Specification", ComponentLink3URL=http://diodes.com/datasheets/ds16003.pdf, DatasheetVersion="Rev. 22 - 2", Mounting Technology="Surface Mount", PackageDescription="2-Pin SMD, Body 4.3 x 2.605 mm, Height 2.3 mm", PackageReference=S1M-13-F-SMA-2, PackageVersion="Rev. 22 - 2", Packing="Tape and Reel", PartNumber=S1M-13-F, RoHS=TRUE
D11: library part CMP-2000-06621-1, "LTST-C170KSKT LED Yellow, 75 mW, 80 mA, -55 to 85 degC, 2-Pin SMD, RoHS, Tape and Reel", Emitting Color=Amber, Forward Current=30mA, Forward Voltage=2.4V, Manufacturer=Lite-On, Operating Temp Range=-55Cto85C, Operating Temperature Classification=Industrial, Package Description="2-Pin Surface Mount Device, Body 2 x 1.25 mm", Package Reference=C170KSKT, Package Type=ChipLed, Power Dissipation=75W, Reverse Voltage=5V, Test Current (It)=20mA, Chip Material=AlGaInP, Datasheet URL=http://optoelectronics.liteon.com/upload/download/DS-22-99-0188/S_110_LTST-C170KSKT.pdf, Datasheet Version="Rev. H, 04/2014", DELETED=Compliant, Dominant Wave Length=587nm, High Brightness=Yes, Lens Dimensions=1.4x1.25x0.6mm, Lum Intensity=112mcd, Luminous Intensity=112mcd, Main Category=ChipLED, Manufacturer URL=http://www.us.liteon.com/, Mounting=SurfaceMount, Mounting Technology=SurfaceMount, Number of  Elements=1, Packaging=TapeandReel, Peak Wavelength=588nm, Pin Count=2, Product Depth (mm)=1.25mm, Product Height (mm)=1.1mm, Product Length (mm)=2mm, Rad Hardened=No, Shape Type=Rectangular, Type=Uni-Color, Viewing Angle=130deg
DAC: "True 12-bit, 1-ch, SPI/I2C, voltage-output DAC in WSON package with precision internal reference 10-VSSOP -40 to 125", MANUFACTURER_NAME="Texas Instruments", Copyright="Copyright (C) 2025 Ultra Librarian. All rights reserved.", MANUFACTURER_PART_NUMBER=DAC60501ZDGSR, RefDes=RefDes, Type=Type
DC_JACK_IN: library part CMP-2000-06901-1, "Through Hole Right Angle DC Power Jack, 5 A, 2.5 mm Center Pin, 3 Position, -25 to 85 degC, RoHS, Bulk", Current Rating=5A, Flammability Rating=UL94V-0, Insulation Resistance=100MOhms, Manufacturer=CUIInc., Operating Temperature Range=-25Cto+85C, Package Description="3-Pin Through Hole Device, Body 14.4 x 9 mm, Height 11 mm", Voltage Rating=24V, Brand=CUI, Connector Type=DCPowerJack, Contact Gender=Male, Contact Material=Copper, Contact Plating=Nickel, Datasheet URL=http://www.cui.com/product/resource/pj-102bh.pdf, Datasheet Version="Rev. 1.02, 05/2016", Factory Pack Quantity=280, Housing Material=PolybutyleneTerephthalate(PBT), Inside Contact Diameter=2.5mm, Manufacturer URL=http://www.cui.com/, Mounting Angle=Right, Mounting Style=ThroughHole, Mounting Technology=ThroughHole, Outside Contact Diameter=6.5mm, Package Reference=PJ-102BH, Product=Jacks, Product Category=DCPowerConnectors, RoHS=True, Termination Style=ThroughHole
DECODER1 DECODER2: library part CMP-1633-00901-2, "High Speed CMOS Logic 3-to-8 Line Decoder Demultiplexer Inverting and Non-Inverting, PW0016A, LARGE T&R", F @ Nom Voltage(Max)(Mhz)=25, Generic Part Number=CD74HCT238, ICC @ Nom Voltage(Max)(mA)=0.08, Manufacturer="Texas Instruments", Operating Temperature Range(C)="-55 to 125", Rating=Catalog, tpd @ Nom Voltage(Max)(ns)=35, Voltage(Nom)(V)=5, Bits(#)=8, Channels(#)=1, Code_JEDEC=MO-153, Configuration=3：8, DatasheetVersion=SCHS147I, Function=Decoder/Demultiplexer, Input Type=TTL, Output Drive (IOL/IOH)(Max)(mA)=4/-4, Output Type=CMOS, PackageReference=PW0016A, Schmitt Trigger=No, Technology Family=HCT, Type=Standard, VCC(Max)(V)=5.5, VCC(Min)(V)=4.5
DS1: library part CMP-007-00036-1, "Graphic LCD Display Module Red, Green, Blue (RGB) TFT - Color, IPS (In-Plane Switching) SPI 2 (50.80mm) 320 x 240", Case/Package=None, Check_prices=https://www.snapeda.com/parts/4311/Adafruit+Industries/view-part/?ref=eda, Component Type=Standard, Design Item ID=4311, MF="Adafruit Industries LLC", MP=4311, Pins=11, SnapEDA_Link=https://www.snapeda.com/parts/4311/Adafruit+Industries/view-part/?ref=snap, Source=4311.SchLib
FB1: library part CMP-0686-00732-3, "BLM31PG121SN1L Chip Ferrite Bead Array, 1206, 120Ω @ 100MHz, 0.02Ω, 25%, 3.5A", Case Code (Imperial)=1206, Case Code (Metric)=3216, Current Rating=3.5A, DC Current=3A, DC Resistance (DCR)=20mR, Frequency=100MHz, Max Operating Temperature=125°C, Min Operating Temperature=-55°C, Package Quantity=3000, Tolerance=25%, Case/Package=1206, Contact Plating=Tin, Core Material=Ferrite, Depth=1.6mm, Height=1.1mm, Impedance=120R, Lead Free="Lead Free", Length=3.2mm, Material=Steel, Max Current Rating=3.5A, Max DC Current=3A, Military Standard=Not, Number of Lines=1, Number of Pins=2, Packaging="Tape and Reel", Radiation Hardening=No, RoHS Compliant=Yes, Shielding=Unshielded, Termination=SMD/SMT, Test Frequency=100MHz, Width=1.6mm
I2C UART: library part CMP-02766-001388-1, "CONN HEADER VERT 4POS 2.54MM", Color=Black, Max Current Rating=7.6A, Max Operating Temperature=105°C, Max Voltage Rating (AC)=550V, Min Operating Temperature=-55°C, Package Quantity=1, Connector Type="Male Pin", Contact Material=Bronze, Contact Mating Length=0.23inch, Contact Plating=Tin, Contact Type="Male Pin", Depth=2.54mm, Gender=Male, Housing Color=Black, Housing Material=Polyester, Lead Free="Lead Free", Length=10.16mm, Mount="Through Hole", Number of Contacts=4, Number of Positions=4, Number of Rows=1, Orientation=Straight, Packaging=Bulk, Pitch=2.54mm, Radiation Hardening=No, REACH SVHC="No SVHC", RoHS Compliant=Yes, Series=TSW, Termination=Solder, Width=2.54mm
L1: library part CMP-006-00023-1, "6.8 ÂµH Shielded Molded Inductor 5 A 50mOhm Max Nonstandard", Case/Package=None, Availability="In Stock", Check_prices=https://www.snapeda.com/parts/MGAH06036R8M-10/Laird/view-part/?ref=eda, Component Type=Standard, Design Item ID=MGAH06036R8M-10, MF="Laird-Signal Integrity Products", MP=MGAH06036R8M-10, Pins=2, Price=None, Purchase-URL=https://pricing.snapeda.com/search/part/MGAH06036R8M-10/?ref=eda, SnapEDA_Link=https://www.snapeda.com/parts/MGAH06036R8M-10/Laird/view-part/?ref=snap, Source=MGAH06036R8M-10.SchLib
Logic_Shifter: "Four-channel fixed multidirectional level shifter 14-TSSOP -40 to 125", MANUFACTURER_NAME="Texas Instruments", Copyright="Copyright (C) 2025 Ultra Librarian. All rights reserved.", MANUFACTURER_PART_NUMBER=TXU0304PWR, RefDes=RefDes, Type=Type
MicroSD: library part CMP-11597-000006-1, "CONN MICRO SD R/A PUSH-PUSH SMD", Color=Black, Contact Resistance=100mR, Current Rating=500mA, Flammability Rating="UL94 V-0", Insulation Resistance=1GR, Max Operating Temperature=85°C, Max Voltage Rating (AC)=125V, Min Operating Temperature=-25°C, Package Quantity=400, Connector Type=Connector, Contact Material="Copper Alloy", Contact Plating=Gold, Depth=15.95mm, Gender=Receptacle, Housing Material=Polymer, Lead Free="Lead Free", Length=13.85mm, Mating Cycles=10000, Max Current Rating=500mA, Mount="Surface Mount", Number of Contacts=8, Number of Rows=2, Orientation="Right Angle", Packaging="Tape and Reel", Pitch=1.1mm, Radiation Hardening=No, REACH SVHC="No SVHC", Series=DM3, Termination=Solder, Voltage Rating=125V, Voltage Rating (AC)=125V, Width=13.85mm
MOSFET_CC: library part CMP-32901-000488-1, "MOSFET N-CH 55V 47A TO220AB", Case/Package=TO-220, Continuous Drain Current (ID)=47A, Drain To Source Breakdown Voltage=55V, Drain To Source Resistance=35mR, Gate to Source Voltage (Vgs)=16V, Input Capacitance=1.7nF, Max Operating Temperature=175°C, Max Power Dissipation=110W, Min Operating Temperature=-55°C, Threshold Voltage=2V, Drain to Source Voltage (Vdss)=55V, Element Configuration=Single, Halogen Free="Halogen Free", Height=0.6inch, Lead Free="Lead Free", Length=0.414inch, Max Dual Supply Voltage=55V, Mount="Through Hole", Number of Pins=3, Packaging=Rail/Tube, Power Dissipation=110W, Rds On Max=22mR, REACH SVHC="No SVHC", RoHS Compliant=Yes, Turn-Off Delay Time=26ns, Turn-On Delay Time=11ns, Width=0.185inch
MUX: "Integrated Circuit", MANUFACTURER_NAME="Texas Instruments", Mouser Part Number=595-CD74HCT4067M, Arrow Part Number=CD74HCT4067M, Arrow Price/Stock=https://www.arrow.com/en/products/cd74hct4067m/texas-instruments?utm_currency=USD&region=nac, Datasheet Link=http://www.ti.com/lit/gpn/cd74hct4067, Height=2.65mm, MANUFACTURER_PART_NUMBER=CD74HCT4067M, Mouser Price/Stock=https://www.mouser.co.uk/ProductDetail/Texas-Instruments/CD74HCT4067M?qs=vul0MlC%2Fa1fex%2F7NLRWpgQ%3D%3D
NTC: library part CMP-06022-001050-1, "Thermistor NTC 10kΩ ±1% 2-Pin Radial Bulk", Max Operating Temperature=125°C, Max Power Dissipation=7.5mW, Min Operating Temperature=-40°C, Package Quantity=500, Resistance=10kR, Resistance Tolerance=1%, Height=2mm, Lead Diameter=0.4mm, Lead Free="Lead Free", Lead Pitch=2.5mm, Length=5mm, Mount="Through Hole", Number of Pins=2, Packaging=Bulk, Power Rating=7.5mW, RoHS Compliant=Yes, Series=NXR, Termination=Radial, Tolerance=1%, Width=4mm
OA1: library part CMP-014-00004-1, "Dual, 16V, 11MHz, rail-to-rail input and output low-offset-voltage low-noise operational amplifier", Case/Package="SOT-23-THN-8 Texas Instruments", Check_prices=https://www.snapeda.com/parts/TLV9162IDDFR/Texas+Instruments/view-part/?ref=eda, Component Type=Standard, Design Item ID=TLV9162IDDFR, MF="Texas Instruments", MP=TLV9162IDDFR, Pins=8, SnapEDA_Link=https://www.snapeda.com/parts/TLV9162IDDFR/Texas+Instruments/view-part/?ref=snap, Source=TLV9162IDDFR.SchLib
"POWER MONITOR IC": library part CMP-04895-000197-1, "IC MONITOR PWR/CURR BIDIR 10MSOP", Case/Package=VSSOP, Max Operating Temperature=125°C, Max Supply Voltage=5.5V, Min Operating Temperature=-40°C, Min Supply Voltage=2.7V, Output Current=10mA, Accuracy=0.02%, Lead Free="Lead Free", Mount="Surface Mount", Number of Pins=10, Packaging="Tape and Reel", RoHS Compliant=Yes
R1: library part CMP-009-00018-5, "Chip Resistor, 10 KOhm, +/- 1%, 125 mW, -55 to 155 degC, 0805 (2012 Metric)", Case/Package=0805, Max Operating Temperature=155°C, Min Operating Temperature=-55°C, Power=125mW, Tolerance=1%, Voltage Rating=150V, Mounting Technology=SM, Pins=2, RoHS Compliant=True
R3 R4: library part CMP-02407-010205-1, "MCT06030D5101BP500 RES SMD 5100 OHM 1% 1/8W 0603", Case/Package=0603, Max Operating Temperature=125°C, Min Operating Temperature=-55°C, Resistance=5.1kR, Temperature Coefficient=25ppm/°C, Tolerance=0.1%, Composition="Thin Film", Contact Plating=Tin, Height=450um, Lead Free="Lead Free", Length=1.55mm, Radiation Hardening=No, Width=850um
R5 R8 R21 RPU1 RPU2 RPU3 RPU4 RPU5 RPU6 RPU7 RPU8 RPU9 RPU10 RPU11: library part CMP-009-00032-5, "Chip Resistor, 4.7 KOhm, +/- 1%, 0.125 W, -55 to 155 degC, 0805 (2012 Metric)", Case/Package=0805, Max Operating Temperature=155°C, Min Operating Temperature=-55°C, Power=125mW, Tolerance=1%, Voltage Rating=150V, Mounting Technology=SM, Pins=2, RoHS Compliant=True
R6: library part CMP-02407-010835-1, "MCU08050C4302FP500 RES 1.05K OHM 0.5% 1/5W 0805", Case/Package=0805, Resistance=43000R, Tolerance=1%, Height=450um, Lead Free="Lead Free", Length=2mm, Width=1.25mm
R9: library part CMP-1013-00613-1, "8K2 0.125W 1% 0805 (2012 Metric)  SMD", Case-EIA=0805, Case-Metric=2012, Power="0.125 W", Tolerance="1 %", Technology=SMT
R12 R22 R23 R24 R25 R26 R27 R28 R29 R30 R31: library part CMP-03412-040683-1, "RES 10kΩ 5.00% 0.2W 0603"
R13 R19: library part CMP-07231-003646-1, "CR0805-FX-3000ELF Thick Film Chip Resistors 0805 300Ω 0.125W 1% 100ppm/°C", Case Code (Imperial)=0805, Case Code (Metric)=2012, Max Operating Temperature=155°C, Max Power Dissipation=125mW, Min Operating Temperature=-55°C, Package Quantity=1, Resistance=300R, Temperature Coefficient=100ppm/°C, Tolerance=1%, Voltage Rating=150V, Case/Package=0805, Composition="Thick Film", Contact Plating=Tin, Depth=1.25mm, Features="Moisture Resistant", Height=0.024inch, Length=2mm, Military Standard=Not, Mount="Surface Mount", Number of Terminations=2, Packaging="Tape and Reel", Power Rating=125mW, Radiation Hardening=No, Termination=SMD/SMT, Thickness=508um, Width=1.25mm
R14: library part CMP-03211-002159-1, "CRGP0805F18K CRGP0805 18KΩ 0.33W ±100ppm/°C 1% 150V", Ambient Temperature Range High=+70°C, Manufacturer=TE, Manufacturer Part Number=CRGP0805F18K, Package=CRGP0805, Power Rating=0.33W, Resistance=18KΩ, Temperature="-55°C to +155°C", Temperature Coefficient=±100ppm/°C, Temperature Range High=+155°C, Temperature Range Low=-55°C, Tolerance=0.01, Voltage Rating=150V, Automotive=No, Category=Res, ComponentLink2Description=Datasheet, ComponentLink2URL=https://www.mouser.com/datasheet/2/418/NG_DS_9-1773463-9_A-1358566.pdf, Composition="Thick Film", Device Class L1="Passive Components", Device Class L2=Resistors, Device Class L3="Chip SMD Resistors", Height=0.65mm, Ipc Land Pattern Name=RESC200125X55, Lead Free=Yes, Octopart=https://octopart.com/crgp0805f18k-te+connectivity-91018794, RoHS=TRUE, Series=CRGP
R15: library part CMP-04015-026717-1, "RN73R2ATTD1001B10 1kΩ ±0.1% 0.125W, 1/8W Chip Resistor 0805 (2012 Metric) Moisture Resistant Thin Film"
R17: library part CMP-02407-000077-1, "MCU08050D2001BP500 RES 1.05K OHM 0.5% 1/5W 0805", Case/Package=0805, Max Operating Temperature=125°C, Max Power Dissipation=125mW, Min Operating Temperature=-55°C, Package Quantity=5000, Resistance=2kR, Temperature Coefficient=25ppm/°C, Tolerance=0.1%, Composition="Thin Film", Contact Plating=Tin, Depth=1.25mm, Height=0.022inch, Lead Free="Lead Free", Length=0.079inch, Military Standard=Not, Number of Terminations=2, Packaging="Tape and Reel", Radiation Hardening=No, Width=0.049inch
R20: library part CMP-02407-007717-1, "RES Thick Film, 200kΩ, 1%, 0.33W, 100ppm/°C, 0603", Case/Package=0603, Max Operating Temperature=155°C, Max Power Dissipation=250mW, Min Operating Temperature=-55°C, Package Quantity=5000, Resistance=200kR, Temperature Coefficient=100ppm/°C, Tolerance=1%, Composition="Thick Film", Depth=0.85mm, Features="Automotive AEC-Q200", Height=0.022inch, Lead Free="Lead Free", Length=0.063inch, Military Standard=Not, Number of Terminations=2, Packaging="Tape and Reel", Width=0.033inch
R32 R33 R34 R35 R36 R37 R38 R39 R40 R41: library part CMP-250906-173560-1, "TFCR0603-10W-E-2001BT"
R42: library part CMP-03211-000516-1, "CRGCQ0603F1K2", Ambient Temperature Range High=+70°C, Manufacturer="TE Connectivity", Package=CRGCQ0603, Power Rating=0.1W, Resistance=1.2KΩ, Temperature="-55°C to +155°C", Temperature Coefficient=±100ppm/°C, Temperature Range High=+155°C, Temperature Range Low=-55°C, Tolerance=0.01, Voltage Rating=75V, Category=Res, ComponentLink2Description=Datasheet, ComponentLink2URL=https://www.te.com/commerce/DocumentDelivery/DDEController?Action=showdoc&DocId=Data+Sheet%7F1773204-3%7F1%7Fpdf%7FEnglish%7FENG_DS_1773204-3_1.pdf%7F4-2176339-710, Composition="Thick Film", Device Class L1="Passive Components", Device Class L2=Resistors, Device Class L3="Chip SMD Resistors", Digikey Description="CRGCQ 0603 1K2 1%", Height=0.55mm, Ipc Land Pattern Name=RESC16080X45, Lead Free=Yes, Manufacturer Part Number=CRGCQ0603F1K2, Octopart=https://octopart.com/crgcq0603f1k2-te+connectivity-91018051, RoHS=TRUE, Series=CRGCQ
R43: library part CMP-03211-010325-1, "CRGCQ0603F2K2", Ambient Temperature Range High=+70°C, Manufacturer="TE Connectivity", Package=CRGCQ0603, Power Rating=0.1W, Resistance=2.2KΩ, Temperature="-55°C to +155°C", Temperature Coefficient=±100ppm/°C, Temperature Range High=+155°C, Temperature Range Low=-55°C, Tolerance=0.01, Voltage Rating=75V, Category=Res, ComponentLink2Description=Datasheet, ComponentLink2URL=https://www.te.com/commerce/DocumentDelivery/DDEController?Action=showdoc&DocId=Data+Sheet%7F1773204-3%7F1%7Fpdf%7FEnglish%7FENG_DS_1773204-3_1.pdf%7F4-2176339-766, Composition="Thick Film", Device Class L1="Passive Components", Device Class L2=Resistors, Device Class L3="Chip SMD Resistors", Digikey Description="CRGCQ 0603 2K2 1%", Height=0.55mm, Ipc Land Pattern Name=RESC16080X45, Lead Free=Yes, Manufacturer Part Number=CRGCQ0603F2K2, Octopart=https://octopart.com/crgcq0603f2k2-te+connectivity-91018063, RoHS=TRUE, Series=CRGCQ
RELAY1 RELAY2 RELAY3 RELAY4 RELAY5 RELAY6 RELAY7 RELAY8 RELAY9 RELAY10: library part CMP-08822-000152-1, "RELAY GEN PURPOSE SPST 10A 5V", Coil Current=79.4mA, Coil Power=400mW, Coil Resistance=63R, Coil Voltage (DC)=5V, Contact Current Rating=10A, Max Operating Temperature=85°C, Max Voltage Rating (AC)=250V, Max Voltage Rating (DC)=125V, Min Operating Temperature=-40°C, Package Quantity=500, Coil Type=Non-Latching, Contact Material=Tin, Height=19mm, Lead Free="Lead Free", Length=22.5mm, Max Current Rating=10A, Mount="Through Hole", Number of Pins=4, Operate Time=10ms, Packaging=Tray, Power Consumption=400mW, Power Rating=400mW, Relay Type="General Purpose", Release Time=5ms, RoHS Compliant=Yes, Termination=Solder, Throw Configuration=SPST, Weight=12g, Width=16.5mm
"RELAY_DRIVER 1" "RELAY_DRIVER 2": library part CMP-04912-000075-1, "MOSFET 7CH 16SOIC", Case/Package=SOIC, Collector Emitter Saturation Voltage=750mV, Collector Emitter Voltage (VCEO)=20V, Max Collector Current=140mA, Max Operating Temperature=85°C, Max Power Dissipation=860mW, Min Operating Temperature=-40°C, Output Voltage=16V, Package Quantity=1, Height=1.5mm, Lead Free="Lead Free", Length=10mm, Mount="Surface Mount", Number of Drivers=7, Number Of Outputs=7, Number of Pins=16, Output Current=140mA, Packaging="Tape and Reel", Power Dissipation=860mW, Radiation Hardening=No, REACH SVHC="No SVHC", RoHS Compliant=Yes, Series=-, Weight=0.004998oz, Width=4mm
RPP1 RPP2 RPP3 RPP4 RPP5: "Integrated Circuit", MANUFACTURER_NAME=MCC, Datasheet Link=https://www.mccsemi.com/pdf/Products/MCQ7328(SOP-8).pdf, Height=1.75mm, MANUFACTURER_PART_NUMBER=MCQ7328-TP
SHUNT: library part CMP-07231-007405-1, "RES 0.05 OHM 1% 3W 2512"